# Altium PCB M3 ICE.PcbDoc (part 1 of 2)
Units mil, origin at the board's own origin, x right, y up, seen from the top; angles counter-clockwise.
Board outline 4160 x 4350 mil, 4 copper layers (Top Layer, Mid-Layer 1, Mid-Layer 2, Bottom Layer); 242 components, 240 nets, 954 pads, 145 vias.
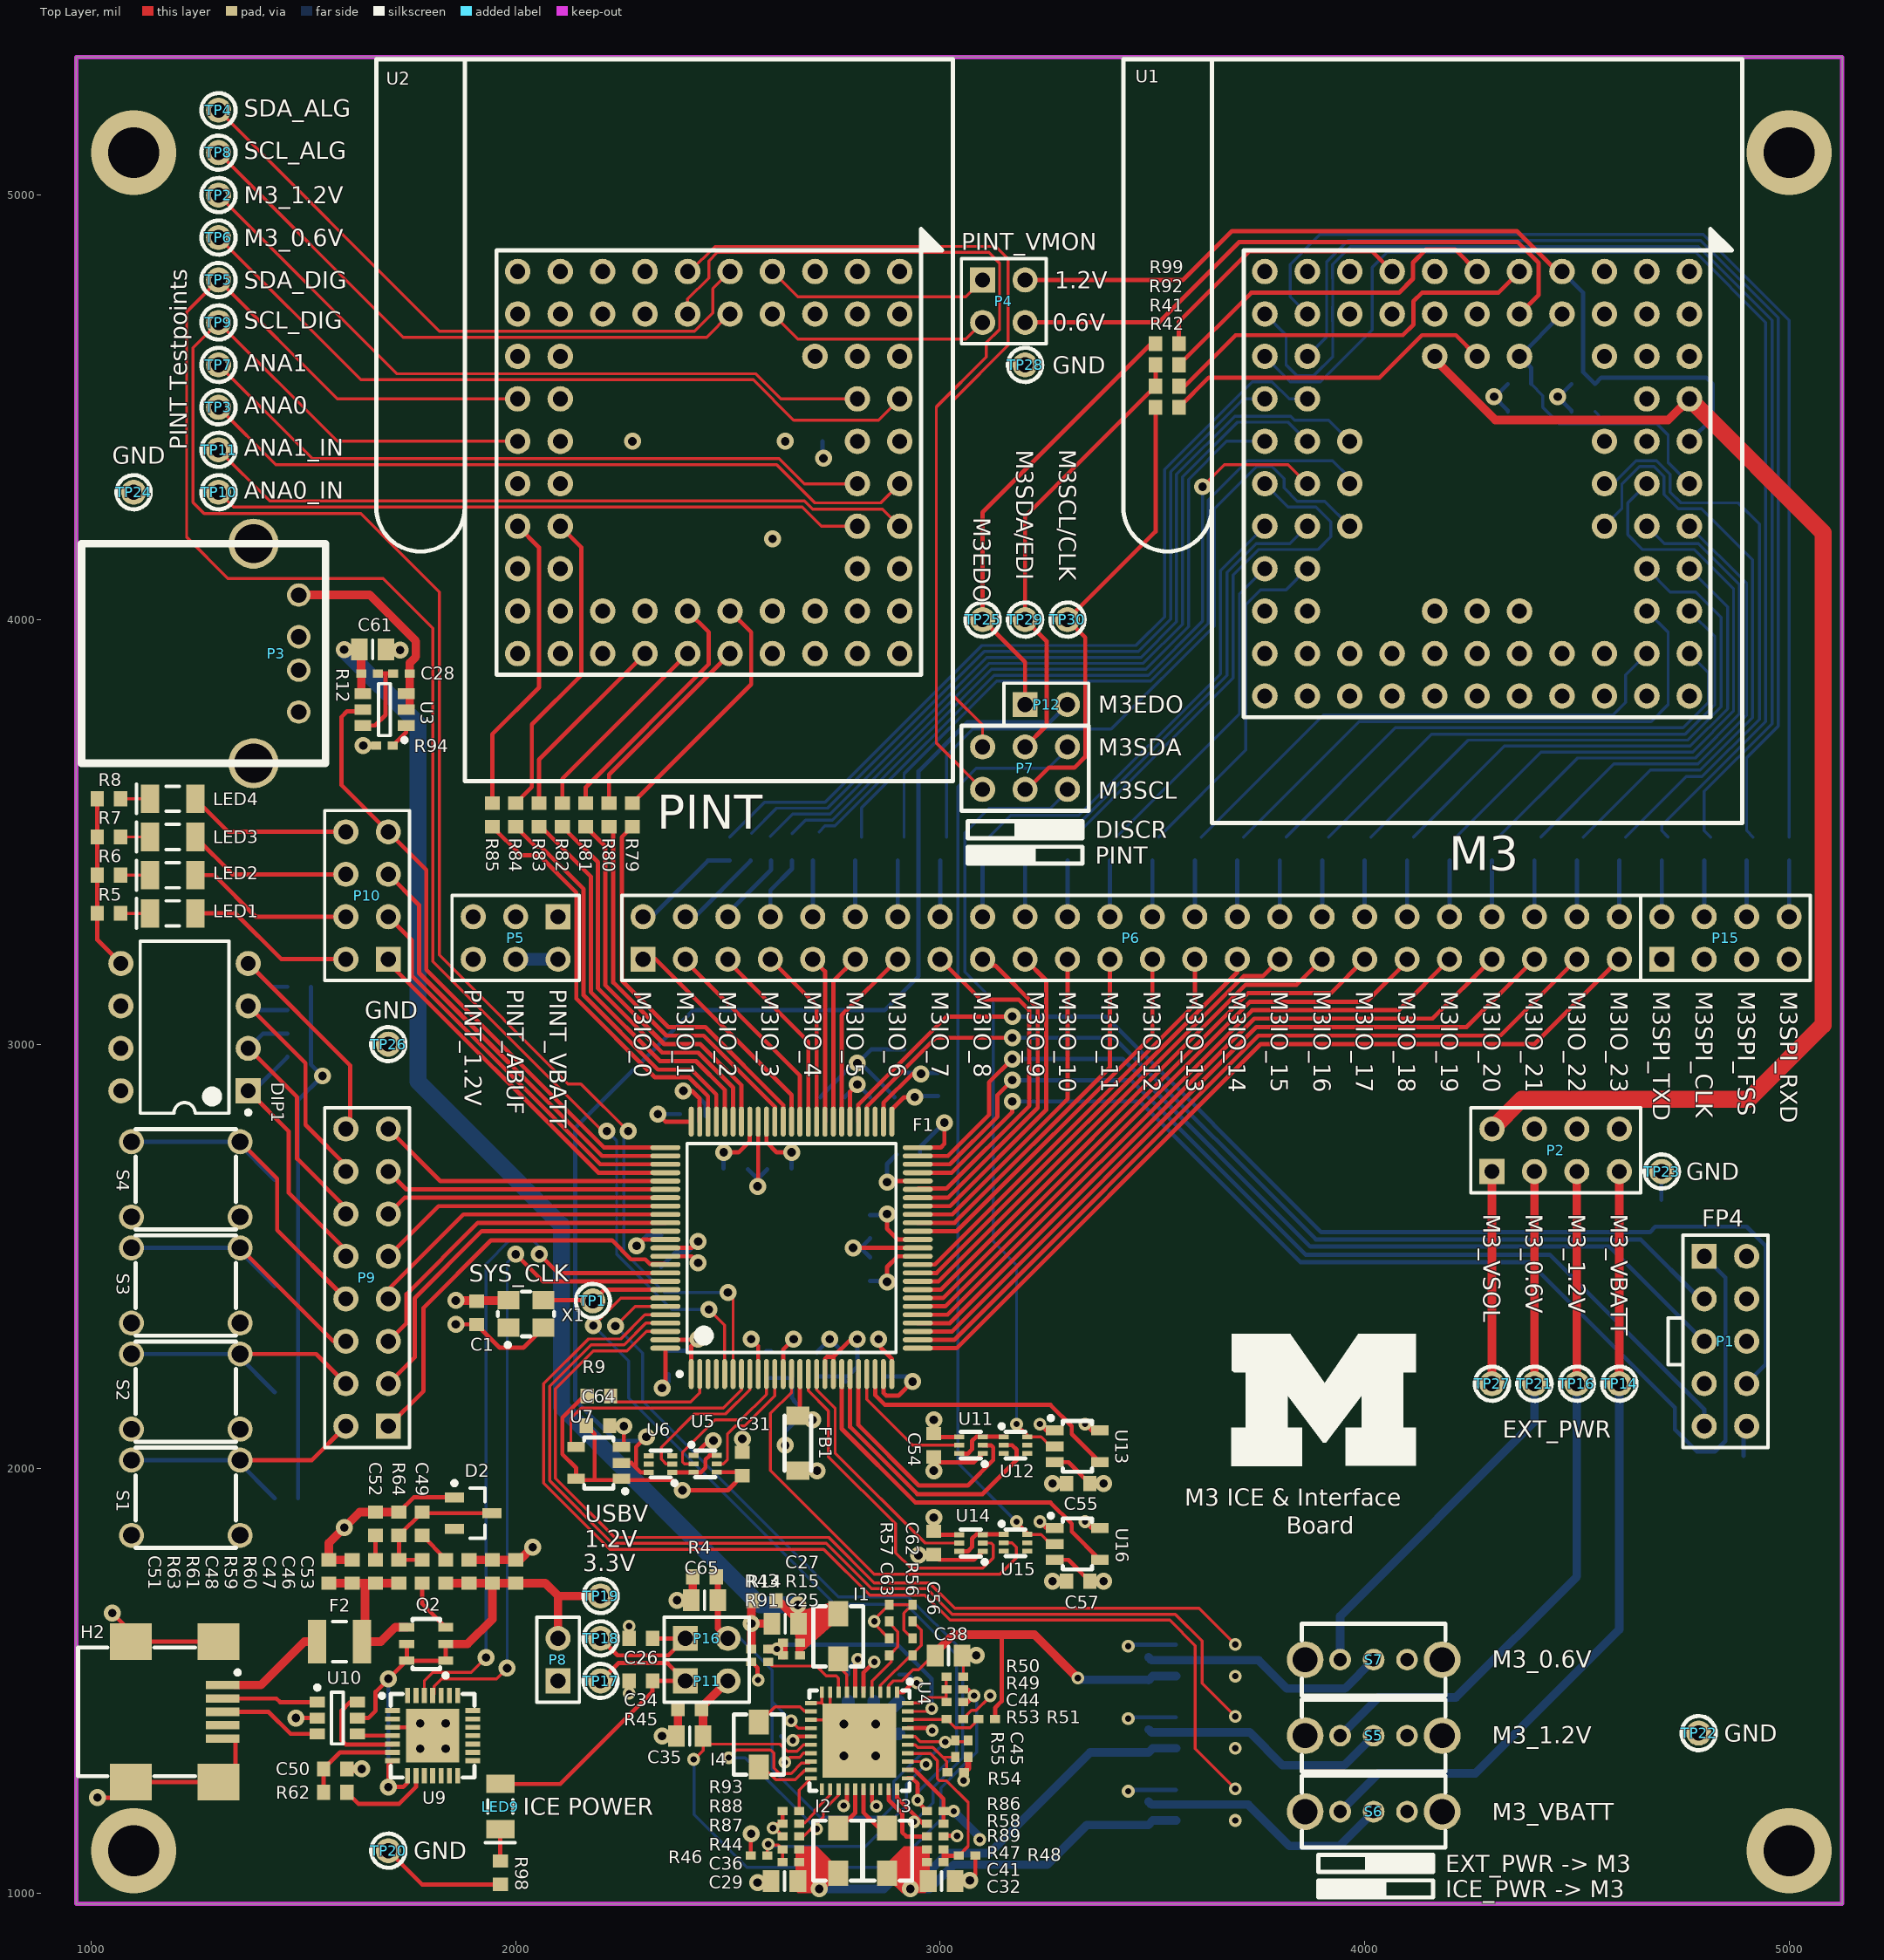
[diagram p0: Top Layer view]
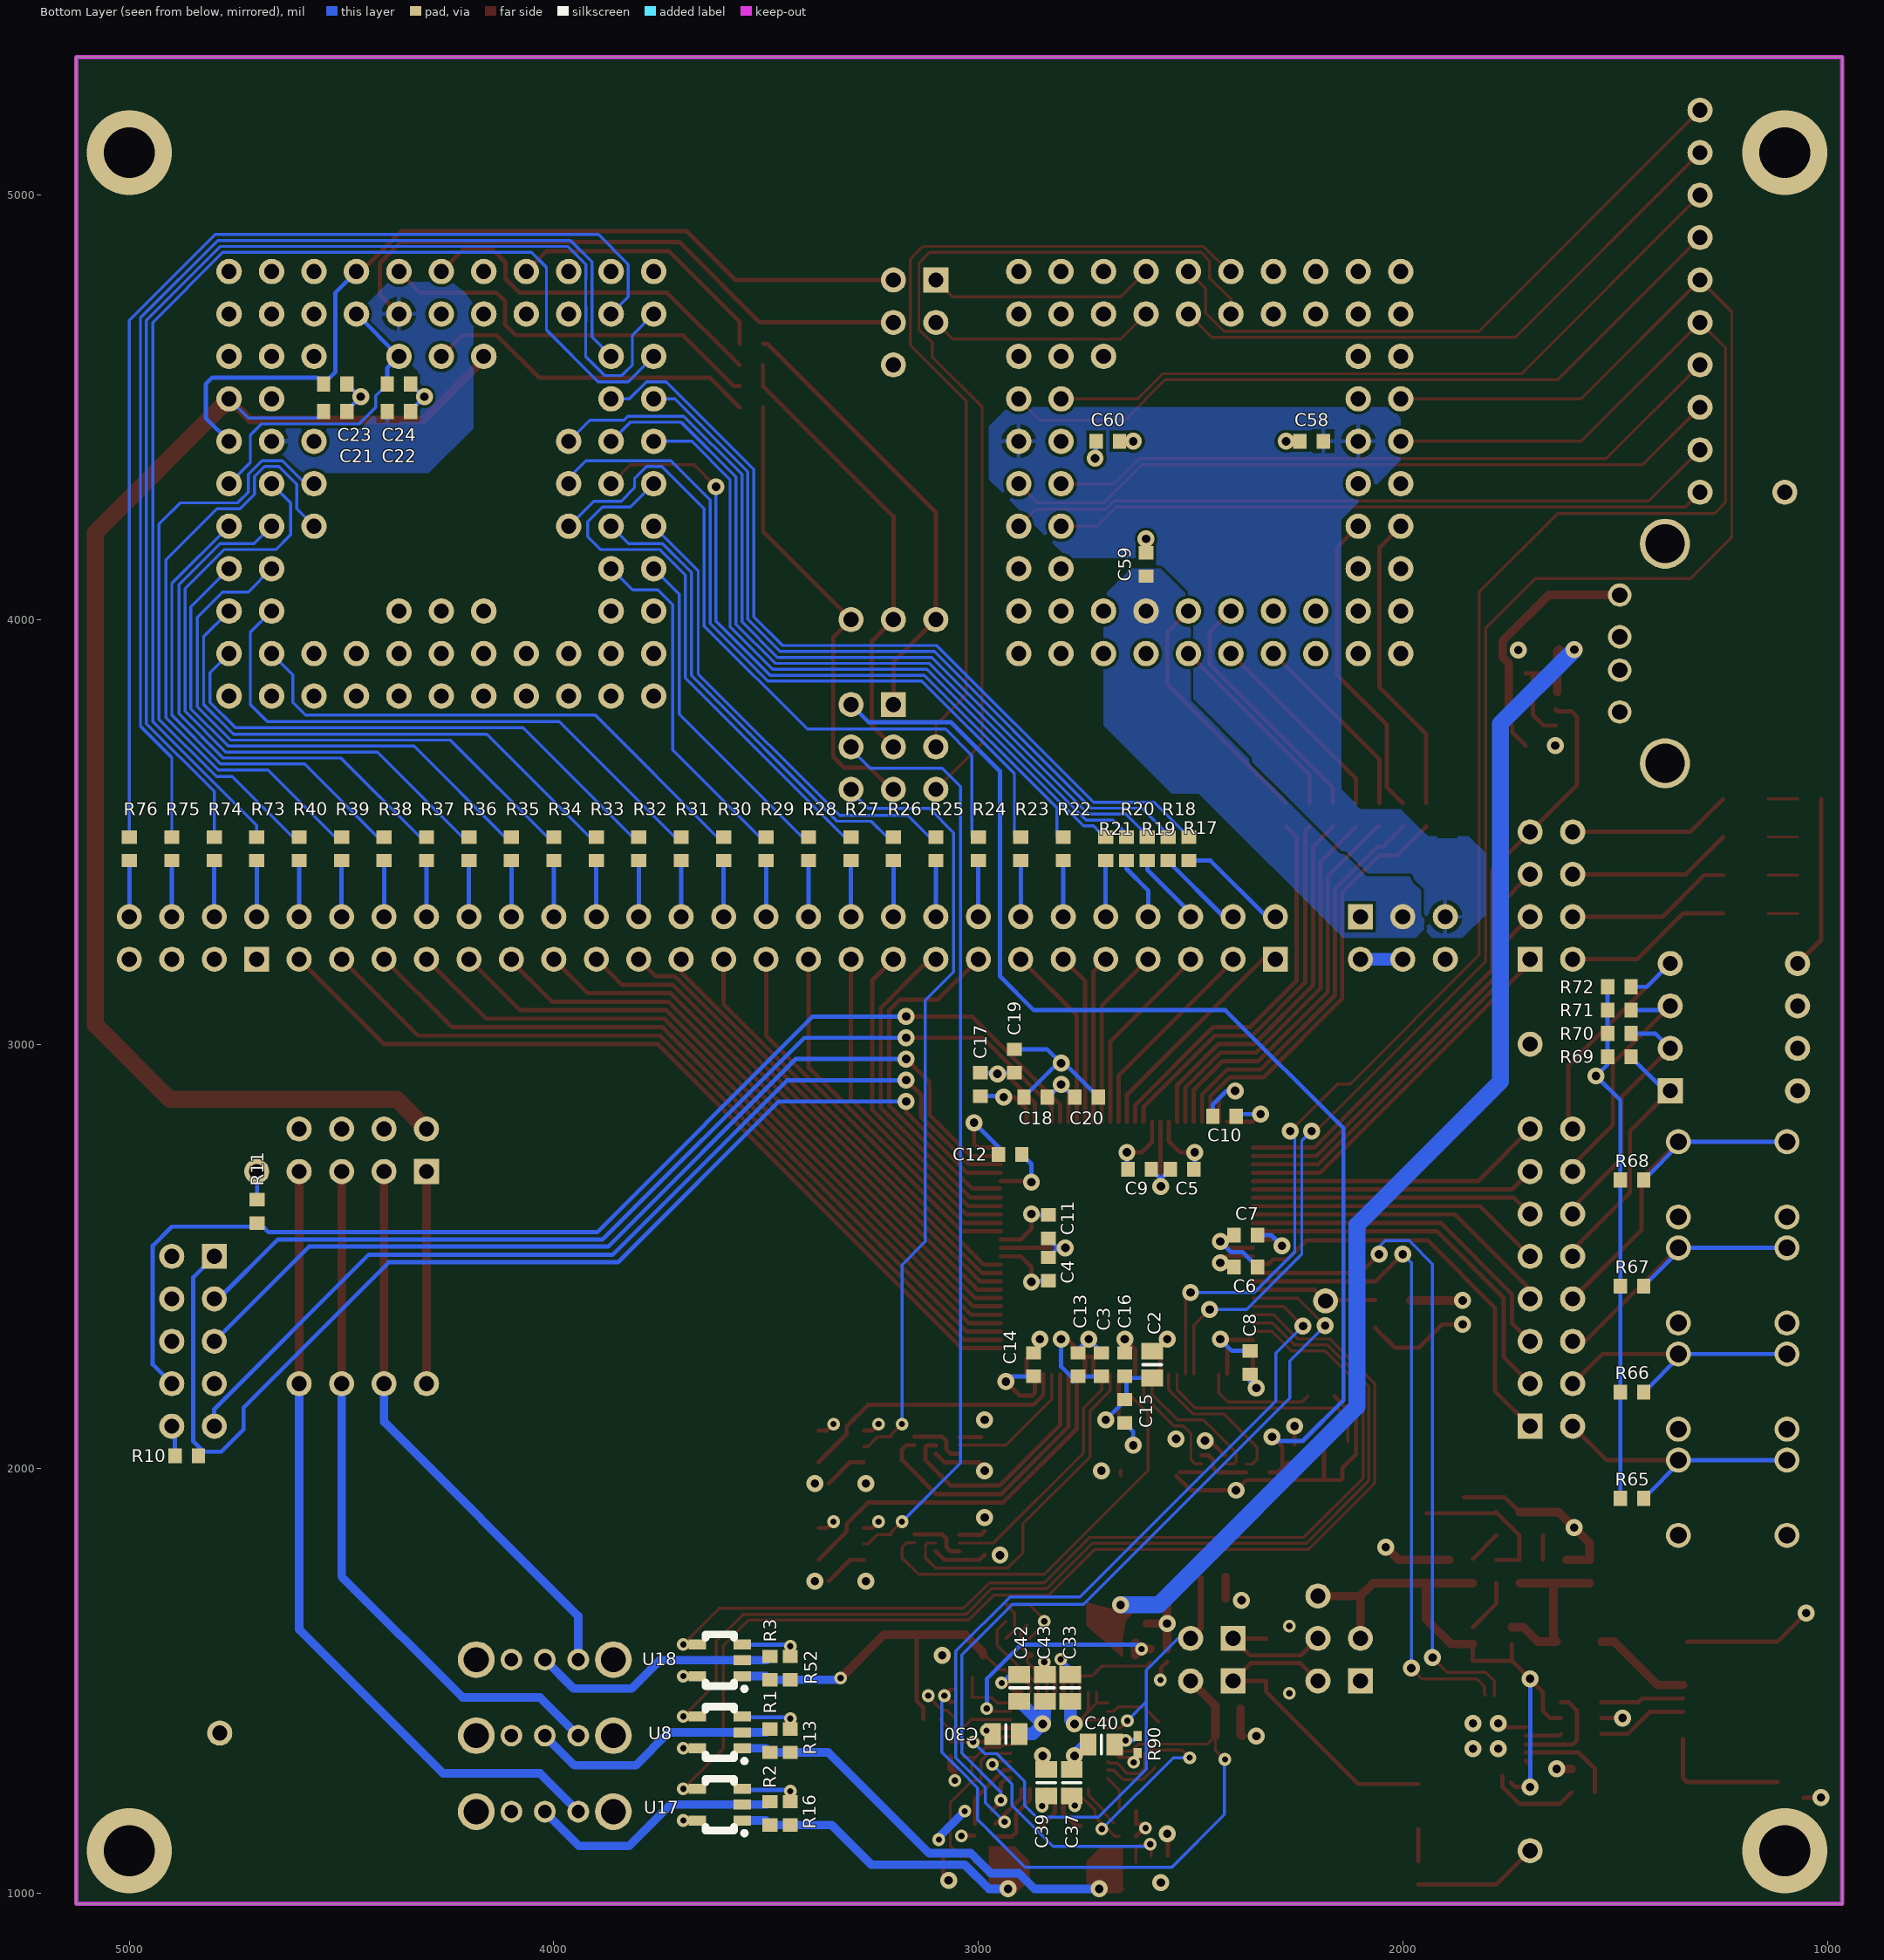
[diagram p1: Bottom Layer view, seen from below]
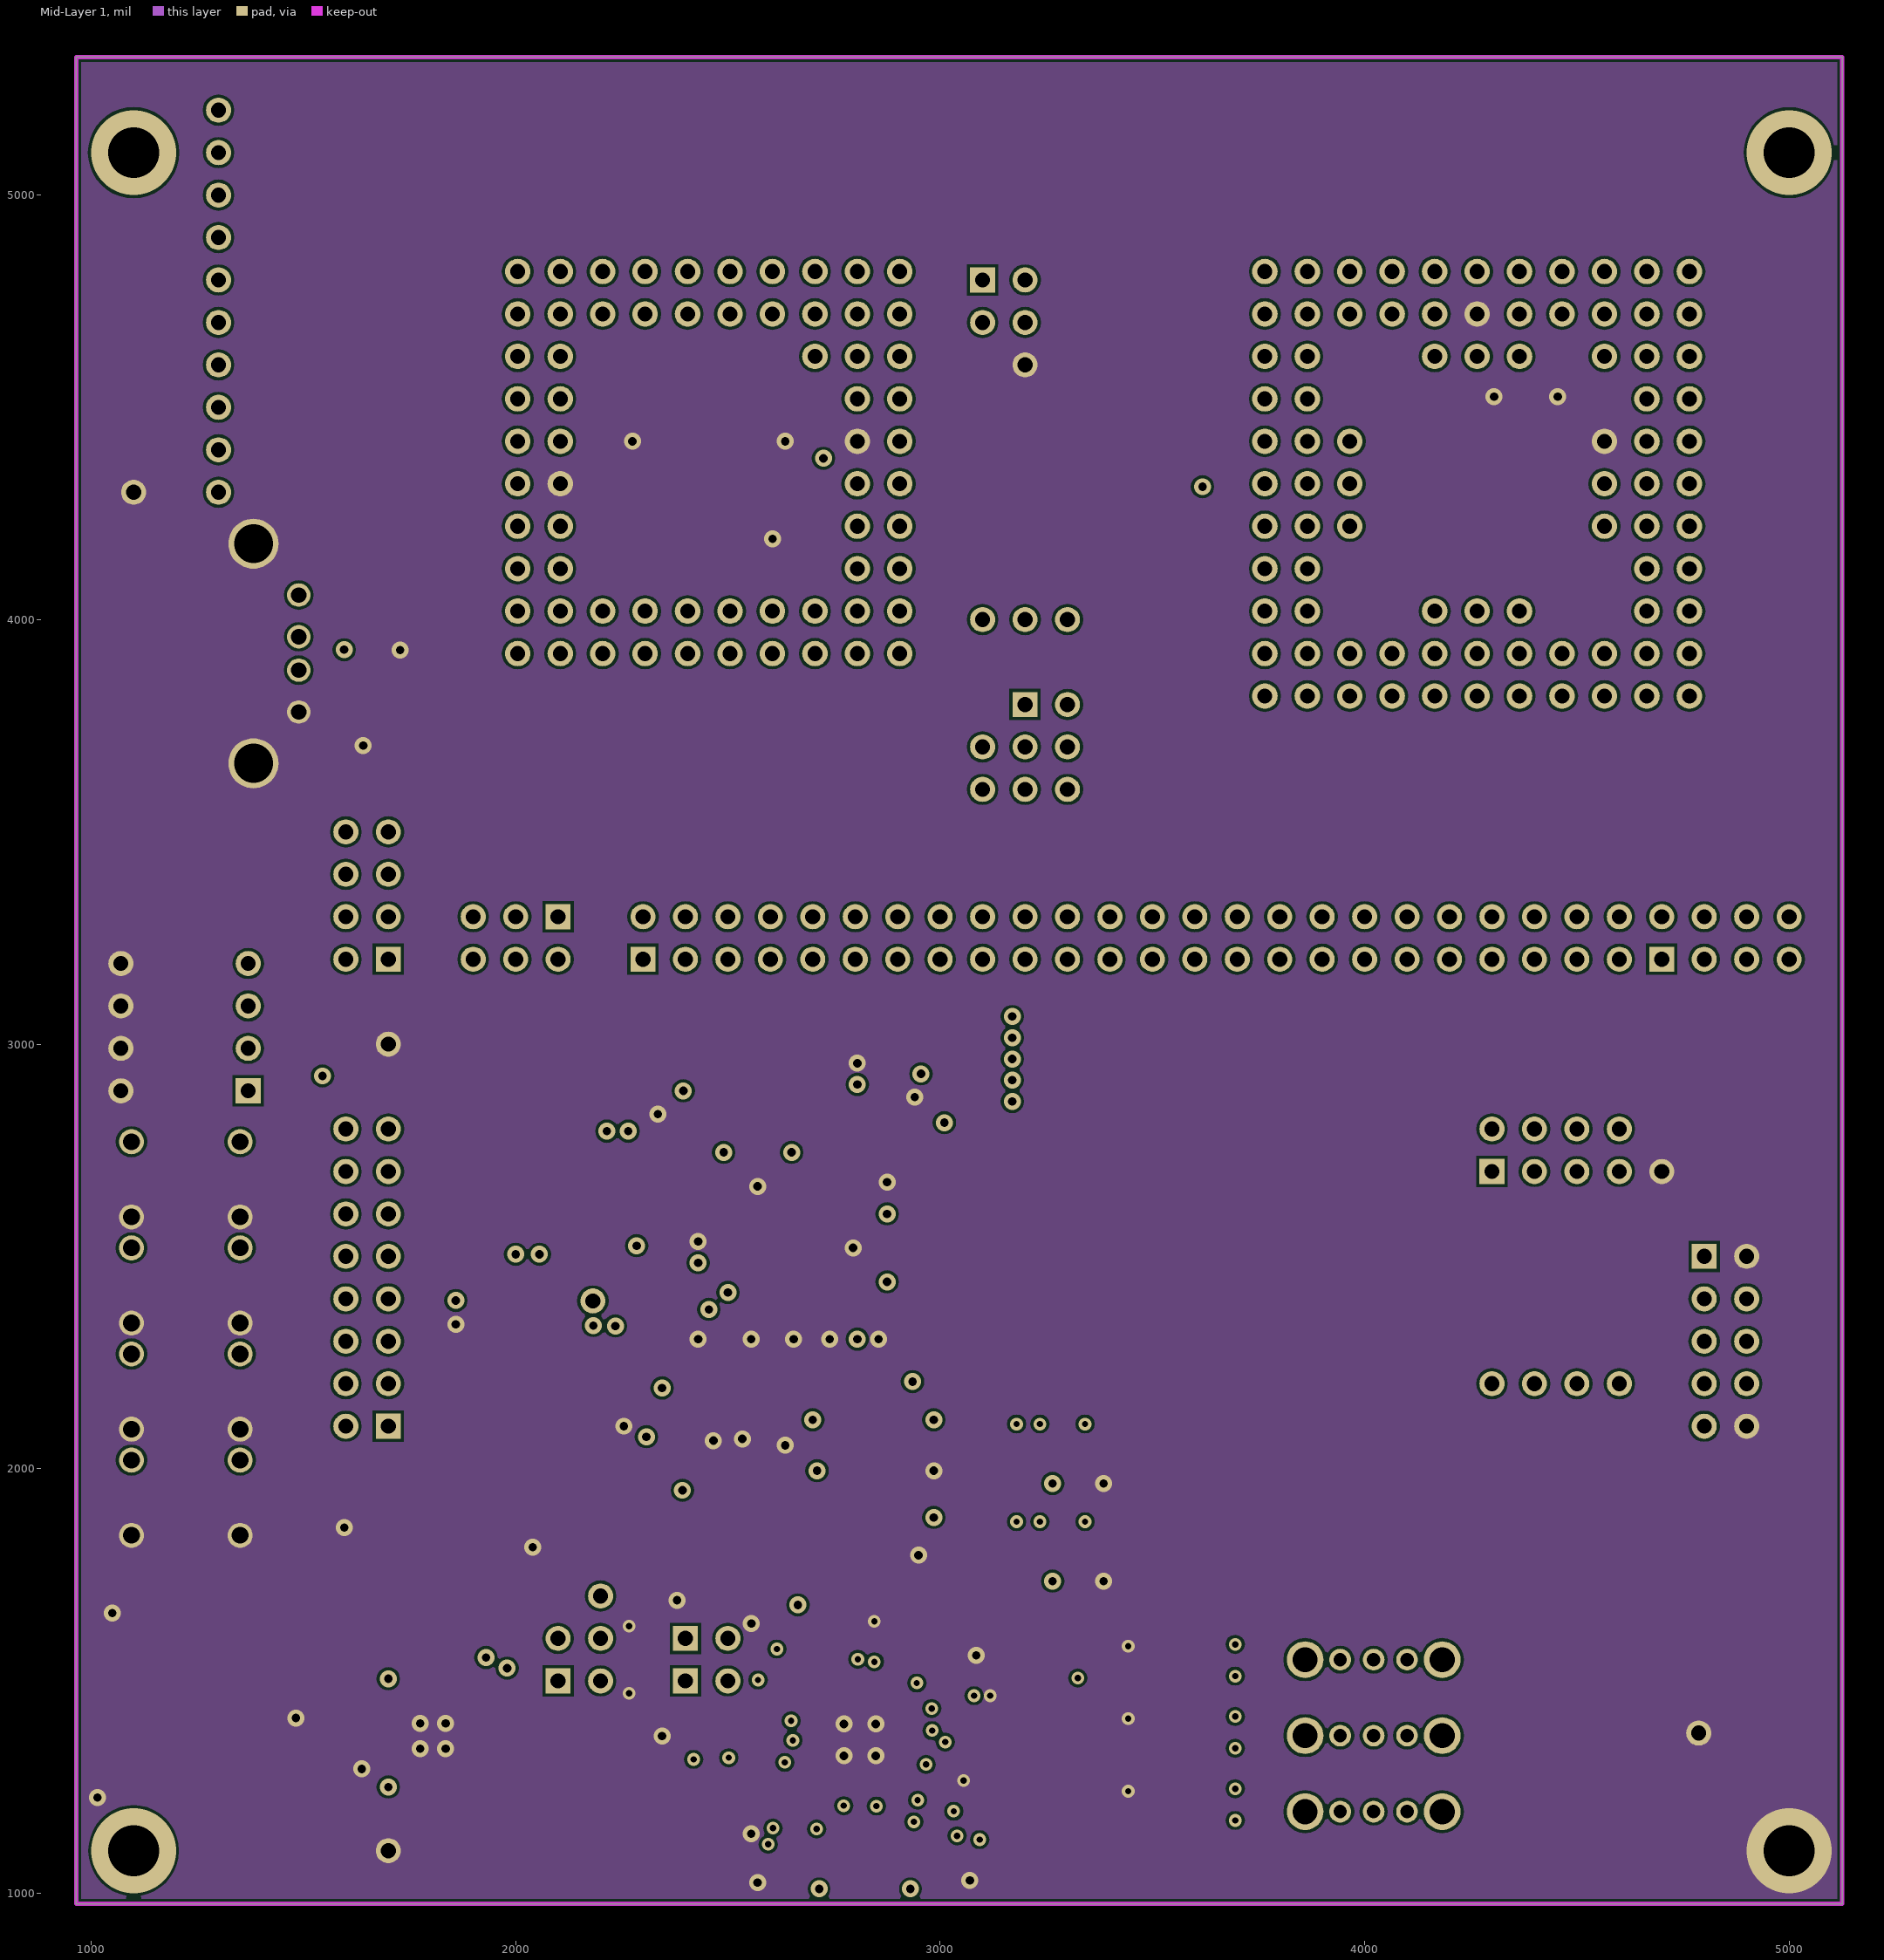
[diagram p2: Mid-Layer 1]
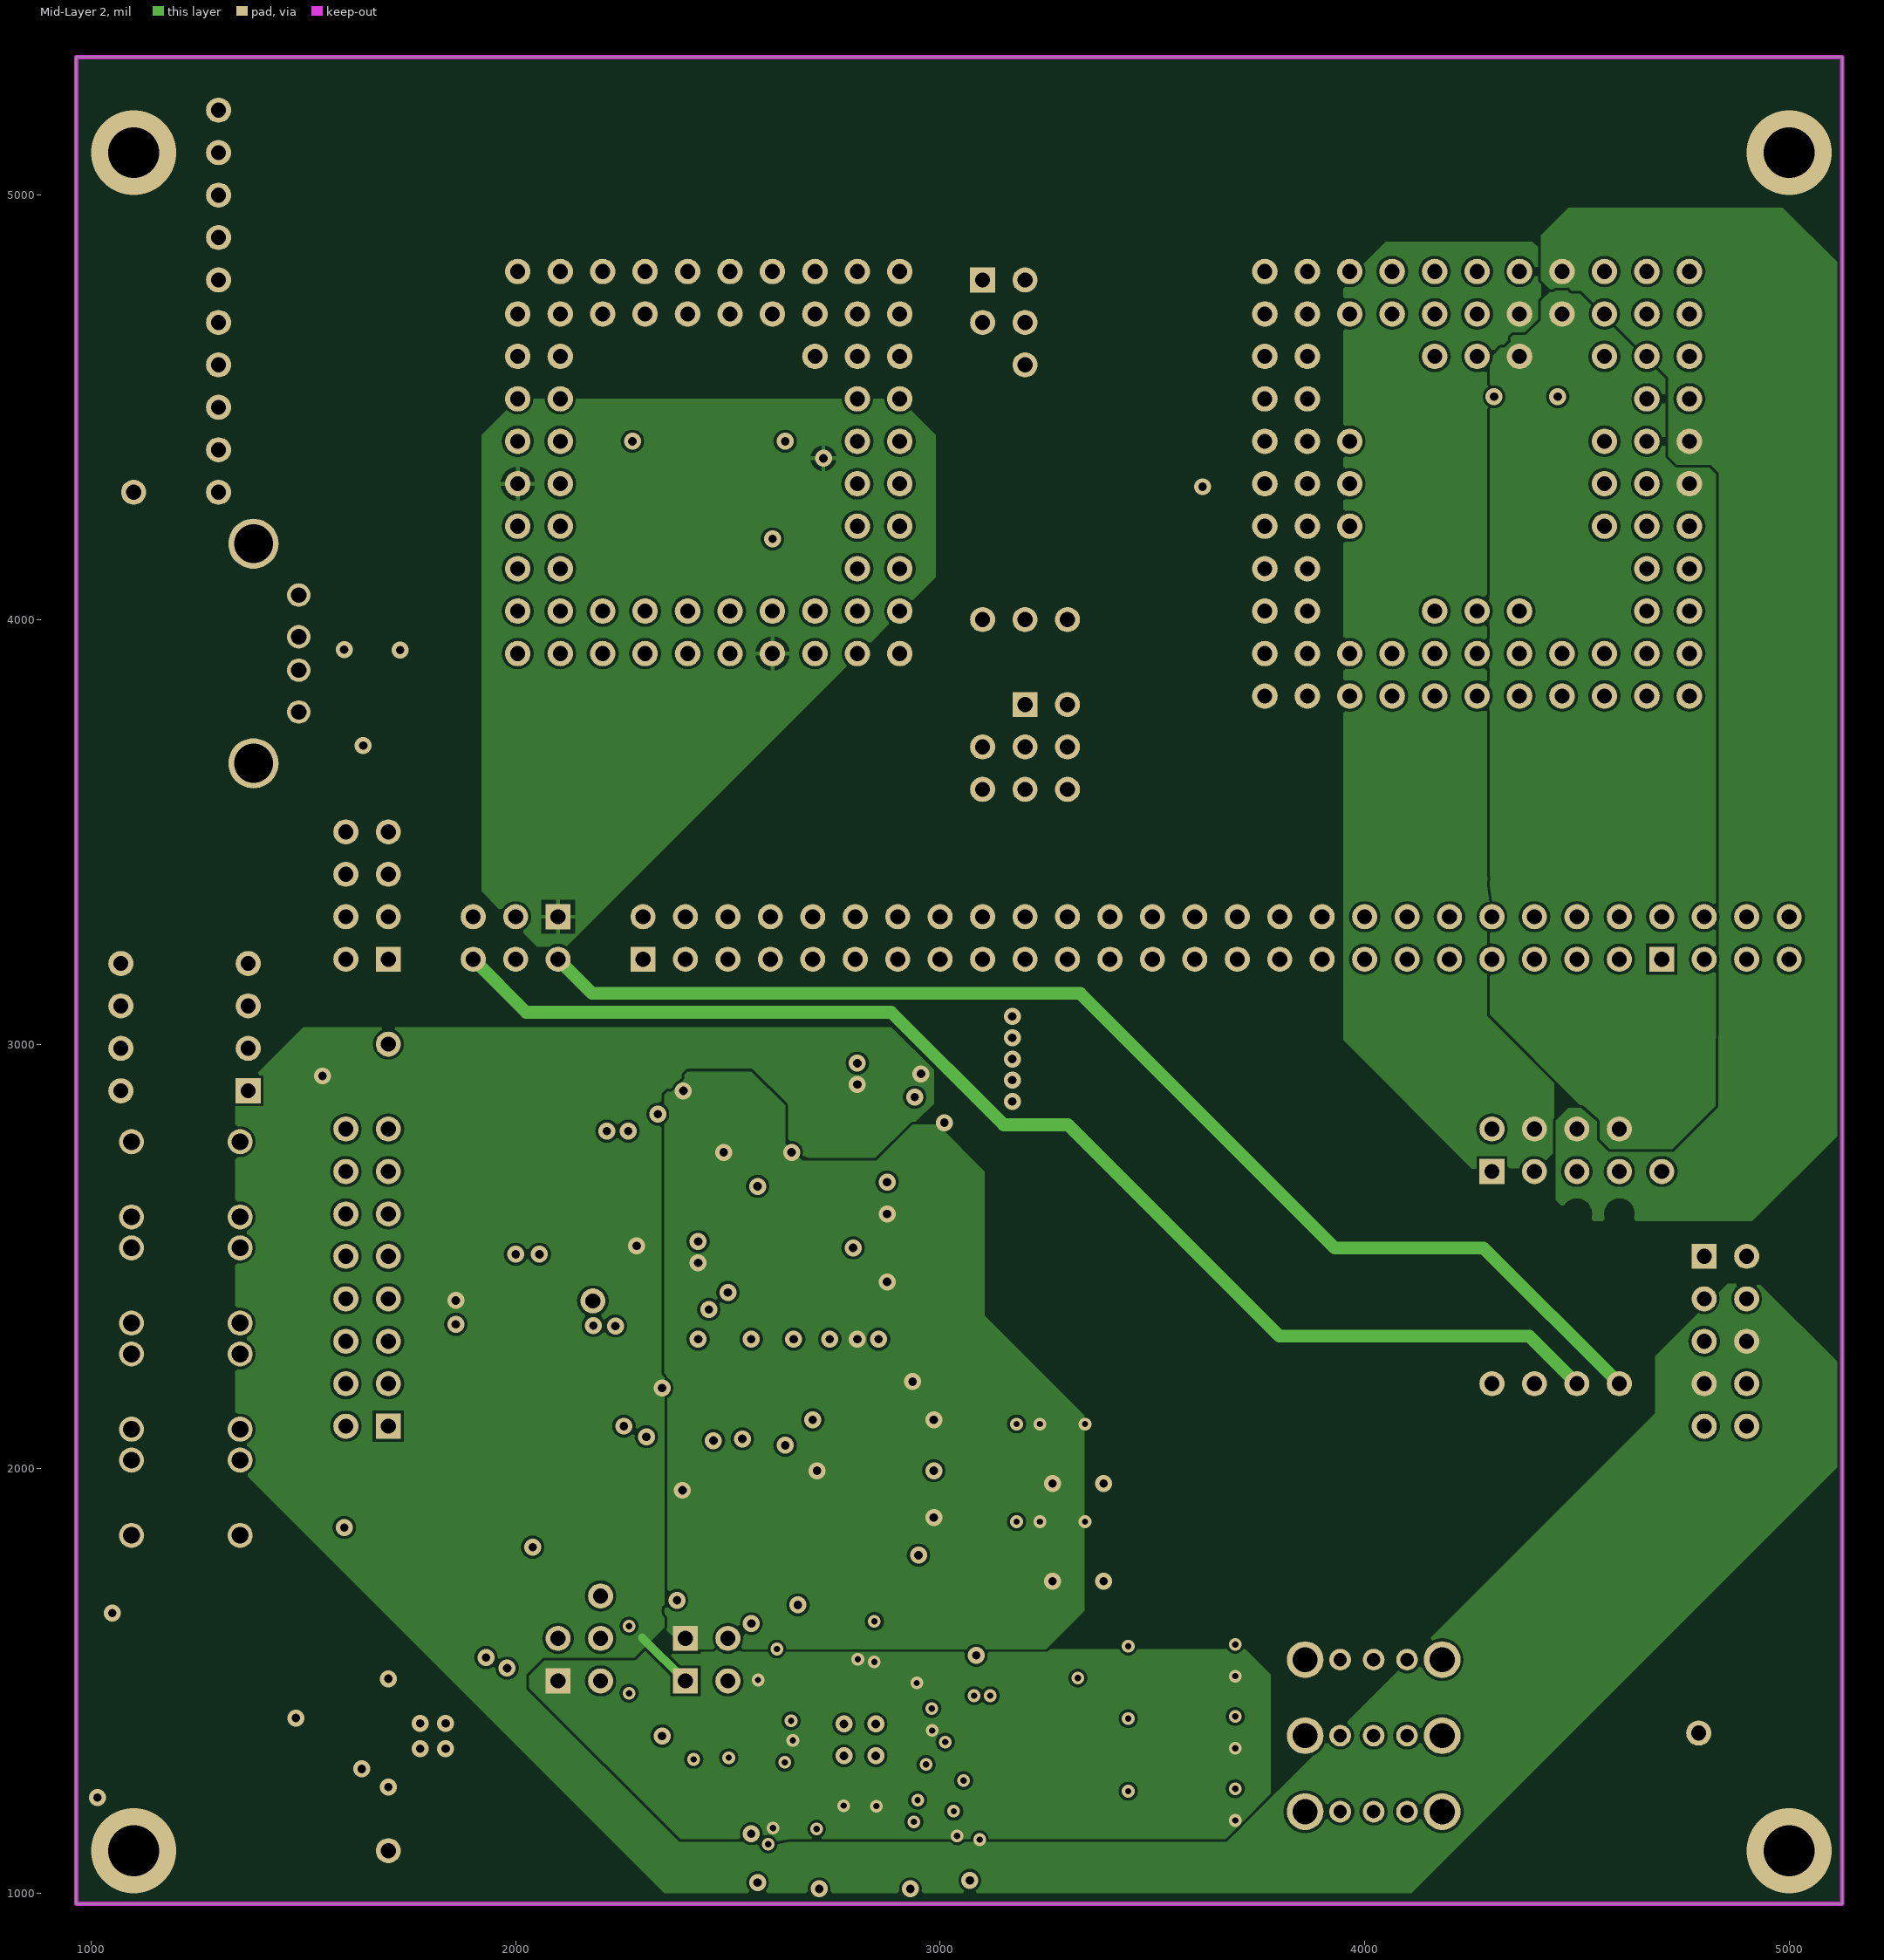
[diagram p3: Mid-Layer 2]

## Layer stack, top to bottom
Top Layer: signal copper 1.4
Dielectric: core 12.6, FR-4, Dk 4.8
Mid-Layer 1: signal copper 1.4
Dielectric: prepreg 12.6, FR-4, Dk 4.8
Mid-Layer 2: signal copper 1.4
Dielectric: core 12.6, FR-4, Dk 4.8
Bottom Layer: signal copper 1.4

## Board outline
965,975 965,5325 5125,5325 5125,975

## Design rules (kind name [scope] priority, off if disabled: settings)
Clearance [All] p1: gap=7
ComponentClearance [All] p1 off: gap=10 collisioncheckmode=3 verticalgap=10 showdistances=FALSE
HoleSize [All] p1: absolutevalues=TRUE maxlimit=1000 minlimit=1 maxpercent=80.000 minpercent=20.000
MinimumAnnularRing [All] p1: minimumring=7
MinimumSolderMaskSliver [All] p1: minsoldermaskwidth=0
PolygonConnect [All] p1: connectstyle=Direct reliefconductorwidth=10 reliefentries=4 polygonreliefangle="90 Angle" airgapwidth=10
RoutingVias [All] p1: holewidth=20 width=40 viastyle="Through Hole" minholewidth=15 minwidth=30 maxholewidth=28 maxwidth=50
SilkToSilkClearance [All] p1: silktosilkclearance=0
SilkscreenOverComponentPads [All] p1 off: minsilkscreentomaskgap=10
SolderMaskExpansion [All] p1: expansion=4
Width [All] p1: maxlimit=50 minlimit=7 preferedwidth=8
23 further rules are at their usual default settings.

## Classes and differential pairs
component class USB_to_UART: C46 C47 C48 C49 C50 C51 C52 C53 D2 F2 H2 Q2 R59 R60 R61 R62 R63 R64 U9 U10
component class Power: C25 C26 C27 C29 C30 C32 C33 C34 C35 C36 C37 C38 C39 C40 C41 C42 C43 C44 C45 C62 C63 C65 I1 I2 I3 I4 LED9 P8 P11 P16 R1 R2 R3 R4 R13 R14 R15 R16 R43 R44 R45 R46 R47 R48 R49 R50 R51 R52 R53 R54 R55 R56 R57 R58 R86 R87 R88 R89 R90 R91 R93 R98 S5 S6 S7 TP14 TP16 TP17 TP18 TP19 TP20 TP21 TP22 TP23 TP24 TP26 TP27 TP28 U4 U8 U17 U18
component class M3_Discrete_Interface: C31 C54 C55 C56 C57 C64 U5 U6 U7 U11 U12 U13 U14 U15 U16
component class M3_Chip: C21 C22 C23 C24 C58 C59 C60 P2 P4 P5 P6 P7 P12 P15 R17 R18 R19 R20 R21 R22 R23 R24 R25 R26 R27 R28 R29 R30 R31 R32 R33 R34 R35 R36 R37 R38 R39 R40 R41 R42 R73 R74 R75 R76 R79 R80 R81 R82 R83 R84 R85 R92 R99 TP2 TP3 TP4 TP5 TP6 TP7 TP8 TP9 TP10 TP11 TP25 TP29 TP30 U1 U2
component class FPGA_misc: C1 C2 C3 C4 C5 C6 C7 C8 C9 C10 C11 C12 C13 C14 C15 C16 C17 C18 C19 C20 FB1 P1 R10 R11 TP1 X1
component class FPGA_IO: C28 C61 DIP1 F1 LED0 LED1 LED2 LED3 LED4 P3 P9 P10 R5 R6 R7 R8 R9 R12 R65 R66 R67 R68 R69 R70 R71 R72 R94 S1 S2 S3 S4 U3

## Components (designator, comment, footprint, x,y, rotation, side; value= is the part's Value field where it differs from the comment)
C1 "Cap Semi" 1608[0603] 1908,2367 r90 top
C2 "Cap Chip" 0805 2590,2245 r270 bottom
C3 "Cap Semi" 1608[0603] 2710,2245 r270 bottom
C4 "Cap Semi" 1608[0603] 2835,2470 r270 bottom
C5 "Cap Semi" 1608[0603] 2520,2705 r180 bottom
C6 "Cap Semi" 1608[0603] 2370,2475 r0 bottom
C7 "Cap Semi" 1608[0603] 2370,2550 r180 bottom
C8 "Cap Semi" 1608[0603] 2360,2250 r270 bottom
C9 "Cap Semi" 1608[0603] 2620,2705 r0 bottom
C10 "Cap Semi" 1608[0603] 2420,2830 r0 bottom
C11 "Cap Semi" 1608[0603] 2835,2570 r90 bottom
C12 "Cap Semi" 1608[0603] 2925,2740 r0 bottom
C13 "Cap Semi" 1608[0603] 2765,2245 r270 bottom
C14 "Cap Semi" 1608[0603] 2870,2245 r270 bottom
C15 "Cap Semi" 1608[0603] 2655,2135 r90 bottom
C16 "Cap Semi" 1608[0603] 2655,2245 r270 bottom
C17 "Cap Semi" 1608[0603] 2995,2905 r90 bottom
C18 "Cap Semi" 1608[0603] 2865,2875 r180 bottom
C19 "Cap Semi" 1608[0603] 2915,2960 r270 bottom
C20 "Cap Semi" 1608[0603] 2745,2875 r0 bottom
C21 "Cap Semi" 1608[0603] 4515,4490 r0 bottom
C22 "Cap Semi" 1608[0603] 4365,4490 r0 bottom
C23 "Cap Semi" 1608[0603] 4515,4555 r0 bottom
C24 "Cap Semi" 1608[0603] 4365,4555 r0 bottom
C25 "Cap Semi" 0402 2650,1560 r0 top
C26 "Cap Semi" 1608[0603] 2295,1600 r0 top
C27 "Cap Chip" 0805 2635,1635 r0 top
C28 "Cap Semi" 0402 1731,3873 r180 top
C29 "Cap Chip" 0805 2633.43,1028.35 r0 top
C30 "Cap Chip" 0805 2935,1375 r180 bottom
C31 "Cap Semi" 1608[0603] 2534,2010.69 r270 top
C32 "Cap Chip" 0805 3003.43,1028.35 r180 top
C33 "Cap Chip" 0805 2783.43,1483.35 r270 bottom
C34 "Cap Semi" 1608[0603] 2295,1500 r0 top
C35 "Cap Chip" 0805 2410,1370 r0 top
C36 "Cap Semi" 0402 2648.43,1073.35 r0 top
C37 "Cap Chip" 0805 2780,1260 r90 bottom
C38 "Cap Chip" 0805 3020,1560 r180 top
C39 "Cap Chip" 0805 2840,1260 r90 bottom
C40 "Cap Chip" 0805 2710,1350 r0 bottom
C41 "Cap Semi" 0402 2988.43,1073.35 r180 top
C42 "Cap Chip" 0805 2903.43,1483.35 r270 bottom
C43 "Cap Chip" 0805 2843.43,1483.35 r270 bottom
C44 "Cap Semi" 0402 3035,1450 r0 top
C45 "Cap Semi" 0402 3066,1340 r270 top
C46 "Cap Semi" 1608[0603] 1945,1757.56 r270 top
C47 "Cap Semi" 1608[0603] 1890,1757.56 r270 top
C48 "Cap Semi" 1608[0603] 1725,1757.56 r270 top
C49 "Cap Semi" 1608[0603] 1780,1870 r90 top
C50 "Cap Semi" 1608[0603] 1575,1292.56 r180 top
C51 "Cap Semi" 1608[0603] 1560,1757.56 r270 top
C52 "Cap Semi" 1608[0603] 1670,1870 r270 top
C53 "Cap Semi" 1608[0603] 2000,1757.56 r270 top
C54 "Cap Semi" 1608[0603] 2985,2055 r90 top
C55 "Cap Semi" 1608[0603] 3325,1965 r180 top
C56 "Cap Semi" 1608[0603] 2985,1825 r90 top
C57 "Cap Semi" 1608[0603] 3325,1735 r180 top
C58 "Cap Semi" 1608[0603] 2215,4420 r180 bottom
C59 "Cap Semi" 1608[0603] 2605,4130 r270 bottom
C60 "Cap Semi" 1608[0603] 2695,4420 r0 bottom
C61 "Cap Chip" 0805 1663,3930 r0 top
C62 "Cap Semi" 0402 2935,1660 r270 top
C63 "Cap Semi" 0402 2880,1580 r270 top
C64 "Cap Semi" 1608[0603] 2194,2101 r180 top
C65 "Cap Chip" 0805 2445,1690 r180 top
D2 "BAT54" SOT-23_N 1900,1895 r0 top
DIP1 "ADE0404" DIP-8 1220,3040 r180 top
F1 "AGLN250V2-VQG100" VQ100_N 2650,2520 r90 top
F2 "MICROSMD050F-2" 1210 1585,1592.56 r0 top
FB1 "HF30ACC321611-T" Ferrite_Bead_3.2mm_1.6mm 2665,1995 r90 top
H2 "UX60A-MB-5ST" "USB Mini-B" 1310,1490 r270 top
I1 "NR5040T1R5N" INDUCTOR_.118x.142mm 2760,1605 r90 top
I2 "NR5040T1R5N" INDUCTOR_.118x.142mm 2760,1100 r270 top
I3 "NR5040T1R5N" INDUCTOR_.118x.142mm 2875,1100 r270 top
I4 "NR5040T1R5N" INDUCTOR_.118x.142mm 2573,1350 r270 top
LED1 "LED 1206" 1206_LED 1192,3308 r180 top
LED2 "LED 1206" 1206_LED 1192,3398 r180 top
LED3 "LED 1206" 1206_LED 1192,3488 r180 top
LED4 "LED 1206" 1206_LED 1192,3578 r180 top
LED9 "LED 1206" 1206_LED 1964,1204 r270 top
P1 "Header 5X2" HDR2X5 4800,2500 r270 top
P2 "Header 4X2" HDR2X4 4300,2700 r0 top
P3 "USB_HORIZONTAL" USB_HORIZONTAL 1489,4058 r270 top
P4 "Header 2X2" HDR2X2 3100,4800 r270 top
P5 "Header 3X2" HDR2X3 2100,3300 r180 top
P6 "Header 24X2" HDR2X24 2300,3200 r0 top
P7 "2P2T .1\" Mux" HDR3x2 3100,3700 r0 top
P8 "Header 2" HDR1X2 2100,1500 r90 top
P9 "Header 8X2" HDR2X8 1700,2100 r90 top
P10 "Header 4X2" HDR2X4 1700,3200 r90 top
P11 "Header 2" HDR1X2 2400,1500 r0 top
P12 "Header 2" HDR1X2 3200,3800 r0 top
P15 "Header 4X2" HDR2X4 4700,3200 r0 top
P16 "Header 2" HDR1X2 2400,1600 r0 top
Q2 "SI3477" TSOP-6 1835,1547.56 r90 top
R1 "Res Chip" 0603 3491,1359 r270 bottom
R2 "Res Chip" 0603 3491,1188 r270 bottom
R3 "Res Chip" 0603 3491,1530 r270 bottom
R4 "Res Chip" 0603 2445,1745 r180 top
R5 "Res Chip" 0603 1042,3308 r0 top
R6 "Res Chip" 0603 1042,3398 r0 top
R7 "Res Chip" 0603 1042,3488 r0 top
R8 "Res Chip" 0603 1042,3578 r0 top
R9 "Res Chip" 0603 2196,2171 r180 top
R10 "Res Chip" 0603 4865,2030 r0 bottom
R11 "Res Chip" 0603 4699,2606 r90 bottom
R12 "Res Chip" 0402 1656,3873 r0 top
R13 "Res Chip" 0603 3443,1359 r270 bottom
R14 "Res Chip" 0603 2586,1689 r0 top
R15 "Res Chip" 0402 2650,1590 r180 top
R16 "Res Chip" 0603 3443,1188 r270 bottom
R17 "Res Chip" 0603 2504,3460 r270 bottom
R18 "Res Chip" 0603 2553,3460 r270 bottom
R19 "Res Chip" 0603 2602,3460 r270 bottom
R20 "Res Chip" 0603 2651,3460 r270 bottom
R21 "Res Chip" 0603 2700,3460 r270 bottom
R22 "Res Chip" 0603 2800,3460 r270 bottom
R23 "Res Chip" 0603 2900,3460 r270 bottom
R24 "Res Chip" 0603 3000,3460 r270 bottom
R25 "Res Chip" 0603 3100,3460 r270 bottom
R26 "Res Chip" 0603 3200,3460 r270 bottom
R27 "Res Chip" 0603 3300,3460 r270 bottom
R28 "Res Chip" 0603 3400,3460 r270 bottom
R29 "Res Chip" 0603 3500,3460 r270 bottom
R30 "Res Chip" 0603 3600,3460 r270 bottom
R31 "Res Chip" 0603 3700,3460 r270 bottom
R32 "Res Chip" 0603 3800,3460 r270 bottom
R33 "Res Chip" 0603 3900,3460 r270 bottom
R34 "Res Chip" 0603 4000,3460 r270 bottom
R35 "Res Chip" 0603 4100,3460 r270 bottom
R36 "Res Chip" 0603 4200,3460 r270 bottom
R37 "Res Chip" 0603 4300,3460 r270 bottom
R38 "Res Chip" 0603 4400,3460 r270 bottom
R39 "Res Chip" 0603 4500,3460 r270 bottom
R40 "Res Chip" 0603 4600,3460 r270 bottom
R41 "Res Chip" 0603 3535,4550 r180 top
R42 "Res Chip" 0603 3535,4500 r180 top
R43 "Res Chip" 0402 2575,1575 r180 top
R44 "Res Chip" 0402 2648.43,1103.35 r180 top
R45 "Res Chip" 0603 2410,1435 r0 top
R46 "Res Chip" 0402 2573.43,1088.35 r180 top
R47 "Res Chip" 0402 2988.43,1103.35 r0 top
R48 "Res Chip" 0402 3063.43,1088.35 r0 top
R49 "Res Chip" 0402 3035,1480 r180 top
R50 "Res Chip" 0402 3035,1510 r0 top
R51 "Res Chip" 0402 3110,1410 r180 top
R52 "Res Chip" 0603 3443,1530 r270 bottom
R53 "Res Chip" 0402 3035,1410 r0 top
R54 "Res Chip" 0402 3037,1285 r180 top
R55 "Res Chip" 0402 3036,1340 r90 top
R56 "Res Chip" 0402 2935,1580 r90 top
R57 "Res Chip" 0402 2880,1660 r90 top
R58 "Res Chip" 0402 2988.43,1163.35 r0 top
R59 "Res Chip" 0603 1780,1757.56 r270 top
R60 "Res Chip" 0603 1835,1757.56 r270 top
R61 "Res Chip" 0603 1670,1757.56 r270 top
R62 "Res Chip" 0603 1575,1237.56 r180 top
R63 "Res Chip" 0603 1615,1757.56 r270 top
R64 "Res Chip" 0603 1725,1870 r270 top
R65 "Res Chip" 0603 1460,1930 r180 bottom
R66 "Res Chip" 0603 1460,2180 r180 bottom
R67 "Res Chip" 0603 1460,2430 r180 bottom
R68 "Res Chip" 0603 1460,2680 r180 bottom
R69 "Res Chip" 0603 1490,2970 r180 bottom
R70 "Res Chip" 0603 1490,3025 r180 bottom
R71 "Res Chip" 0603 1490,3080 r180 bottom
R72 "Res Chip" 0603 1490,3135 r180 bottom
R73 "Res Chip" 0603 4700,3460 r270 bottom
R74 "Res Chip" 0603 4800,3460 r270 bottom
R75 "Res Chip" 0603 4900,3460 r270 bottom
R76 "Res Chip" 0603 5000,3460 r270 bottom
R79 "Res Chip" 0603 2275,3540 r90 top
R80 "Res Chip" 0603 2220,3540 r90 top
R81 "Res Chip" 0603 2165,3540 r90 top
R82 "Res Chip" 0603 2110,3540 r90 top
R83 "Res Chip" 0603 2055,3540 r90 top
R84 "Res Chip" 0603 2000,3540 r90 top
R85 "Res Chip" 0603 1945,3540 r90 top
R86 "Res Chip" 0402 2988.43,1193.35 r0 top
R87 "Res Chip" 0402 2648.43,1133.35 r180 top
R88 "Res Chip" 0402 2648.43,1163.35 r180 top
R89 "Res Chip" 0402 2988.43,1133.35 r0 top
R90 "Res Chip" 0402 2625,1350 r90 bottom
R91 "Res Chip" 0402 2575,1545 r180 top
R92 "Res Chip" 0603 3535,4600 r180 top
R93 "Res Chip" 0402 2648.43,1193.35 r0 top
R94 "Res Chip" 0402 1691,3703 r180 top
R98 "Res Chip" 0603 1964,1048 r90 top
R99 "Res Chip" 0603 3535,4650 r180 top
S1 "EVQ-PAE04M" EVQPA 1095,2020 r270 top
S2 "EVQ-PAE04M" EVQPA 1095,2270 r270 top
S3 "EVQ-PAE04M" EVQPA 1095,2520 r270 top
S4 "EVQ-PAE04M" EVQPA 1095,2770 r270 top
S5 "OS102011MS2QN1" SPDT_SW2 4100,1371 r180 top
S6 "OS102011MS2QN1" SPDT_SW2 4100,1192 r180 top
S7 "OS102011MS2QN1" SPDT_SW2 4100,1550 r180 top
TP1 "TP" TP 2182,2395 r0 top
TP2 "TP" TP 1300,5000 r0 top
TP3 "TP" TP 1300,4500 r90 top
TP4 "TP" TP 1300,5200 r0 top
TP5 "TP" TP 1300,4800 r0 top
TP6 "TP" TP 1300,4900 r90 top
TP7 "TP" TP 1300,4600 r90 top
TP8 "TP" TP 1300,5100 r0 top
TP9 "TP" TP 1300,4700 r0 top
TP10 "TP" TP 1300,4300 r90 top
TP11 "TP" TP 1300,4400 r90 top
TP14 "TP" TP 4600,2200 r180 top
TP16 "TP" TP 4500,2200 r90 top
TP17 "TP" TP 2200,1500 r180 top
TP18 "TP" TP 2200,1600 r180 top
TP19 "TP" TP 2200,1700 r90 top
TP20 "TP" TP 1700,1100 r90 top
TP21 "TP" TP 4400,2200 r180 top
TP22 "TP" TP 4787,1377 r90 top
TP23 "TP" TP 4700,2700 r90 top
TP24 "TP" TP 1100,4300 r90 top
TP25 "TP" TP 3100,4000 r90 top
TP26 "TP" TP 1700,3000 r90 top
TP27 "TP" TP 4300,2200 r90 top
TP28 "TP" TP 3200,4600 r90 top
TP29 "TP" TP 3200,4000 r90 top
TP30 "TP" TP 3300,4000 r90 top
U1 "M3" CPGA-84 3765,4820 r270 top
U2 "PINT" CPGA-65 2005,4820 r270 top
U3 "FDC6330L" SUPERSOT-6 1691,3788 r180 top
U4 "LTC3589" QFN-40 2898.43,1473.35 r270 top
U5 "SI1035X" SC-89-6 2419,2031 r270 top
U6 "SI1035X" SC-89-6 2369,1991 r90 top
U7 "SN74AUP1G126" SOT-753 2249,1976 r90 top
U8 "TS5A4594" SOT25 3556,1341.17 r90 bottom
U9 "CP2102" QFN-28 1710,1430 r0 top
U10 "USBLC6-2" SOT23-6_L 1580,1412.56 r0 top
U11 "SI1035X" SC-89-6 3100,2035.63 r90 top
U12 "SI1035X" SC-89-6 3150,2075 r270 top
U13 "SN74AUP1G126" SOT-753 3270,2090 r270 top
U14 "SI1035X" SC-89-6 3100,1805 r90 top
U15 "SI1035X" SC-89-6 3150,1845 r270 top
U16 "SN74AUP1G126" SOT-753 3270,1860 r270 top
U17 "TS5A4594" SOT25 3556,1171.17 r90 bottom
U18 "TS5A4594" SOT25 3556,1511.17 r90 bottom
X1 "ASE-20.000MHZ-LC-T" CRYSTAL_3.2mm_2.5mm 1983,2332 r0 top

## Footprints (in the part's own frame and the unit in brackets; to place one, negate y for a bottom-side part, rotate by r counter-clockwise, add the part's x,y. Pads: shape width x height; smd on the part's side, far side on the other; paste and mask are expansions set on the pad)
0402 [mm] "Chip Capacitor, Body 1.0x0.5mm, IPC High Density"
  rect 0.6x0.5 smd: 1(-0.5,0) 2(0.5,0)
  body extent -0.55,-0.3 0.55,0.3, height 1.3
0603 [mm] "Chip Capacitor, Body 1.6x0.8mm, IPC High Density"
  rect 0.8x0.9 smd: 1(-0.7,0) 2(0.7,0)
  body extent -0.87,-0.48 0.87,0.48, height 1.3
0805 [mm] "Chip Resistor, Body 2.0x1.2mm, IPC High Density"
  rect 1x1.3 smd: 1(-0.8,0) 2(0.8,0)
  silkscreen extent 0,-0.55 0,0.55, body extent -1.07,-0.7 1.07,0.7, height 0.7
1206_LED [mm] "Chip Capacitor, Body 3.2x1.6mm, IPC High Density"
  rect 1.1x1.7 smd: 1(-1.35,0) 2(1.35,0)
  silkscreen extent -0.4,-0.89 2.16,0.89, body extent -1.7,-0.9 1.7,0.9, height 1.3
1210 [mm] "Chip Resistor, Body 3.2x2.5mm, IPC High Density"
  rect 1.1x2.6 smd: 1(-1.35,0) 2(1.35,0)
  silkscreen extent -0.4,-1.2 0.4,1.2, body extent -1.68,-1.32 1.68,1.32, height 0.9
1608[0603] [mm] "Chip Capacitor, Body 1.6x0.8mm, IPC High Density"
  rect 0.8x0.9 smd: 1(-0.7,0) 2(0.7,0)
  body extent -0.87,-0.48 0.87,0.48, height 1.3
CPGA-65 [mil]
  round 60 hole 35: A1(0,900) A2(100,900) A3(200,900) A4(300,900) A5(400,900) A6(500,900) A7(600,900) A8(700,900) A9(800,900) A10(900,900) B1(0,800) B2(100,800) B3(200,800) B4(300,800) B5(400,800) B6(500,800) B7(600,800) B8(700,800) B9(800,800) B10(900,800) C1(0,700) C2(100,700) C3(200,700) C9(800,700) C10(900,700) D1(0,600) D2(100,600) D9(800,600) D10(900,600) E1(0,500) E2(100,500) E9(800,500) E10(900,500) F1(0,400) F2(100,400) F9(800,400) F10(900,400) G1(0,300) G2(100,300) G9(800,300) G10(900,300) H1(0,200) H2(100,200) H9(800,200) H10(900,200) J1(0,100) J2(100,100) J3(200,100) J4(300,100) J5(400,100) J6(500,100) J7(600,100) J8(700,100) J9(800,100) J10(900,100) K1(0,0) K2(100,0) K3(200,0) K4(300,0) K5(400,0) K6(500,0) K7(600,0) K8(700,0) K9(800,0) K10(900,0)
  silkscreen extent -500,-333 1201,1025
CPGA-84 [mil]
  round 60 hole 35: A1(0,1000) A2(100,1000) A3(200,1000) A4(300,1000) A5(400,1000) A6(500,1000) A7(600,1000) A8(700,1000) A9(800,1000) A10(900,1000) A11(1000,1000) B1(0,900) B2(100,900) B3(200,900) B4(300,900) B5(400,900) B6(500,900) B7(600,900) B8(700,900) B9(800,900) B10(900,900) B11(1000,900) C1(0,800) C2(100,800) C3(200,800) C5(400,800) C6(500,800) C7(600,800) C10(900,800) C11(1000,800) D1(0,700) D2(100,700) D10(900,700) D11(1000,700) E1(0,600) E2(100,600) E3(200,600) E9(800,600) E10(900,600) E11(1000,600) F1(0,500) F2(100,500) F3(200,500) F9(800,500) F10(900,500) F11(1000,500) G1(0,400) G2(100,400) G3(200,400) G9(800,400) G10(900,400) G11(1000,400) H1(0,300) H2(100,300) H10(900,300) H11(1000,300) J1(0,200) J2(100,200) J5(400,200) J6(500,200) J7(600,200) J10(900,200) J11(1000,200) K1(0,100) K2(100,100) K3(200,100) K4(300,100) K5(400,100) K6(500,100) K7(600,100) K8(700,100) K9(800,100) K10(900,100) K11(1000,100) L1(0,0) L2(100,0) L3(200,0) L4(300,0) L5(400,0) L6(500,0) L7(600,0) L8(700,0) L9(800,0) L10(900,0) L11(1000,0)
  silkscreen extent -500,-333 1299,1125
CRYSTAL_3.2mm_2.5mm [mm]
  rect 1.3x1.1 smd: 1(0,0) 2(2.1,0) 3(2.1,1.65) 4(0,1.65)
  silkscreen extent -0.64,-1.16 2.73,2.16
DIP-8 [mm] "DIP; 8 Leads; Row Spacing 7.62 mm; Pitch 2.54 mm"
  rect 1.5x1.5 hole 0.9: 1(-3.81,3.81)
  round 1.5 hole 0.9: 2(-3.81,1.27) 3(-3.81,-1.27) 4(-3.81,-3.81) 5(3.81,-3.81) 6(3.81,-1.27) 7(3.81,1.27) 8(3.81,3.81)
  silkscreen extent -3.94,-5.15 2.65,5.23, body extent -3.6,-5.15 3.6,5.15, height 5.08
EVQPA [mm]
  round 1.5 hole 1: 1(0,6.5) 1(0,0) 2(4.5,6.5) 2(4.5,0)
  silkscreen extent -0.75,0.25 5.25,6.25
Ferrite_Bead_3.2mm_1.6mm [mm]
  rect 1.1x1.4 smd: 1(0,0) 2(3.3,0)
  silkscreen extent 0,-0.8 3.3,0.8
HDR1X2 [mm] "Connector; Header; 2 Position"
  rect 1.5x1.5 hole 0.9: 1(0,0)
  round 1.5 hole 0.9: 2(2.54,0)
  silkscreen extent -1.27,-1.27 3.81,1.27
HDR2X2 [mm] "Connector; Header; 2x2 Position"
  rect 1.5x1.5 hole 0.9: 1(0,0)
  round 1.5 hole 0.9: 2(0,2.54) 3(2.54,0) 4(2.54,2.54)
  silkscreen extent -1.27,-1.27 3.81,3.81
HDR2X3 [mm] "Connector; Header; 3x2 Position"
  rect 1.5x1.5 hole 0.9: 1(0,0)
  round 1.5 hole 0.9: 2(0,2.54) 3(2.54,0) 4(2.54,2.54) 5(5.08,0) 6(5.08,2.54)
  silkscreen extent -1.27,-1.27 6.35,3.81
HDR2X4 [mm] "Connector; Header; 4x2 Position"
  rect 1.5x1.5 hole 0.9: 1(0,0)
  round 1.5 hole 0.9: 2(0,2.54) 3(2.54,0) 4(2.54,2.54) 5(5.08,0) 6(5.08,2.54) 7(7.62,0) 8(7.62,2.54)
  silkscreen extent -1.27,-1.27 8.89,3.81
HDR2X5 [mm] "Connector; Header; 5x2 Position"
  rect 1.5x1.5 hole 0.9: 1(0,0)
  round 1.5 hole 0.9: 2(0,2.54) 3(2.54,0) 4(2.54,2.54) 5(5.08,0) 6(5.08,2.54) 7(7.62,0) 8(7.62,2.54) 9(10.16,0) 10(10.16,2.54)
  silkscreen extent -1.27,-1.27 11.43,3.81
HDR2X8 [mm] "Connector; Header; 8x2 Position"
  rect 1.5x1.5 hole 0.9: 1(0,0)
  round 1.5 hole 0.9: 2(0,2.54) 3(2.54,0) 4(2.54,2.54) 5(5.08,0) 6(5.08,2.54) 7(7.62,0) 8(7.62,2.54) 9(10.16,0) 10(10.16,2.54) 11(12.7,0) 12(12.7,2.54) 13(15.24,0) 14(15.24,2.54) 15(17.78,0) 16(17.78,2.54)
  silkscreen extent -1.27,-1.27 19.05,3.81
HDR2X24 [mm] "Connector; Header; 24x2 Position"
  rect 1.5x1.5 hole 0.9: 1(0,0)
  round 1.5 hole 0.9: 2(0,2.54) 3(2.54,0) 4(2.54,2.54) 5(5.08,0) 6(5.08,2.54) 7(7.62,0) 8(7.62,2.54) 9(10.16,0) 10(10.16,2.54) 11(12.7,0) 12(12.7,2.54) 13(15.24,0) 14(15.24,2.54) 15(17.78,0) 16(17.78,2.54) 17(20.32,0) 18(20.32,2.54) 19(22.86,0) 20(22.86,2.54) 21(25.4,0) 22(25.4,2.54) 23(27.94,0) 24(27.94,2.54) 25(30.48,0) 26(30.48,2.54) 27(33.02,0) 28(33.02,2.54) 29(35.56,0) 30(35.56,2.54) 31(38.1,0) 32(38.1,2.54) 33(40.64,0) 34(40.64,2.54) 35(43.18,0) 36(43.18,2.54) 37(45.72,0) 38(45.72,2.54) 39(48.26,0) 40(48.26,2.54) 41(50.8,0) 42(50.8,2.54) 43(53.34,0) 44(53.34,2.54) 45(55.88,0) 46(55.88,2.54) 47(58.42,0) 48(58.42,2.54)
  silkscreen extent -1.27,-1.27 59.69,3.81
HDR3x2 [mm]
  round 1.5 hole 0.9: 1(0,0) 2(2.54,0) 3(5.08,0) 4(0,-2.54) 5(2.54,-2.54) 6(5.08,-2.54)
  silkscreen extent -1.27,-3.81 6.35,1.27
INDUCTOR_.118x.142mm [mm]
  rect 1.5x1.2 smd: 1(-1.35,0) 2(1.35,0)
  silkscreen extent -1.8,-1.5 1.8,1.5
QFN-28 [mm]
  rect 0.9x0.3 smd: 1(0,0) 2(0,-0.5) 3(0,-1) 4(0,-1.5) 5(0,-2) 6(0,-2.5) 7(0,-3) 15(4.8,-3) 16(4.8,-2.5) 17(4.8,-2) 18(4.8,-1.5) 19(4.8,-1) 20(4.8,-0.5) 21(4.8,0)
  rect 0.3x0.9 smd: 8(0.9,-3.9) 9(1.4,-3.9) 10(1.9,-3.9) 11(2.4,-3.9) 12(2.9,-3.9) 13(3.4,-3.9) 14(3.9,-3.9) 22(3.9,0.9) 23(3.4,0.9) 24(2.9,0.9) 25(2.4,0.9) 26(1.9,0.9) 27(1.4,0.9) 28(0.9,0.9)
  rect 3.2x3.2 smd: 29(2.4,-1.5)
  silkscreen extent -0.76,-4 4.9,1.01
QFN-40 [mm]
  rect 0.7x0.25 smd: 1(0,0) 2(0,-0.5) 3(0,-1) 4(0,-1.5) 5(0,-2) 6(0,-2.5) 7(0,-3) 8(0,-3.5) 9(0,-4) 10(0,-4.5) 21(5.8,-4.5) 22(5.8,-4) 23(5.8,-3.5) 24(5.8,-3) 25(5.8,-2.5) 26(5.8,-2) 27(5.8,-1.5) 28(5.8,-1) 29(5.8,-0.5) 30(5.8,0)
  rect 0.25x0.7 smd: 11(0.65,-5.15) 12(1.15,-5.15) 13(1.65,-5.15) 14(2.15,-5.15) 15(2.65,-5.15) 16(3.15,-5.15) 17(3.65,-5.15) 18(4.15,-5.15) 19(4.65,-5.15) 20(5.15,-5.15) 31(5.15,0.65) 32(4.65,0.65) 33(4.15,0.65) 34(3.65,0.65) 35(3.15,0.65) 36(2.65,0.65) 37(2.15,0.65) 38(1.65,0.65) 39(1.15,0.65) 40(0.65,0.65)
  rect 4.42x4.42 smd: 41(2.9,-2.25)
  silkscreen extent -0.76,-5.25 5.9,0.89
SC-89-6 [mm]
  rect 0.3x0.6 smd: 1(0,0) 2(0.5,0) 3(1,0) 4(1,1.4) 5(0.5,1.4) 6(0,1.4)
  silkscreen extent -0.76,-0.25 1.3,1.3
SOT23-6_L [mm] "SOT23, 6-Leads, Body 2.9x1.6mm, Pitch 0.95mm, Lead Span 2.7mm, IPC High Density"
  rect 0.9x0.65 smd: 1(-1.2,0.95) 2(-1.2,0) 3(-1.2,-0.95) 4(1.2,-0.95) 5(1.2,0) 6(1.2,0.95)
  silkscreen extent -1.32,-1.55 0.35,1.95, body extent -0.9,-1.55 0.9,1.55, height 1.45
SOT25 [mm]
  rect 0.6x1.05 smd: 1(0,0) 2(0.95,0) 3(1.9,0) 4(1.9,2.7) 5(0,2.7)
  silkscreen extent -0.88,-0.25 2.5,2.2
SOT-23_N [mm] "SOT23, 3-Leads, Body 2.9x1.3mm, Pitch 0.95mm, Lead Span 2.5mm, IPC Medium Density"
  rect 1.15x0.6 smd: 1(-1.125,0.95) 2(-1.125,-0.95) 3(1.125,0)
  silkscreen extent -1.25,-1.5 0.7,1.92, body extent -0.7,-1.5 0.7,1.5, height 1.1
SOT-753 [mm]
  rect 0.6x1.05 smd: 1(0,0) 2(0.95,0) 3(1.9,0) 4(1.9,2.7) 5(0,2.7)
  silkscreen extent -0.87,-0.36 2.47,2.22
SPDT_SW2 [mm]
  round 1.3 hole 0.8: 1(0,0) 2(2,0) 3(4,0)
  round 2.2 hole 1.5: 4(-2.1,0) 4(6.1,0)
  silkscreen extent -2.3,-2.15 6.3,2.15
SUPERSOT-6 [mm] "SOT23, 6-Leads, Body 2.9x1.6mm, Pitch 0.95mm, Lead Span 2.7mm, IPC High Density"
  rect 1x0.65 smd: 1(-1.3,0.95) 2(-1.3,0) 3(-1.3,-0.95) 4(1.3,-0.95) 5(1.3,0) 6(1.3,0.95)
  silkscreen extent -1.33,-1.55 0.35,1.95, body extent -0.9,-1.55 0.9,1.55, height 1.45
TP [mm]
  round 1.5 hole 0.9: 1(0,0)
  silkscreen extent -1.02,-1.02 1.02,1.02
TSOP-6 [mm]
  rect 0.508x0.9 smd: 1(0,0) 2(1,0) 3(2,0) 4(2,2.325) 5(1,2.325) 6(0,2.325)
  silkscreen extent -1.01,-0.13 2.5,1.98
"USB Mini-B" [mm]
  rect 0.5x2 smd: 1(0,0) 2(0.8,0) 3(1.6,0) 4(2.4,0) 5(3.2,0)
  rect 2.2x2.5 smd: 6(-2.6,-0.25) 7(5.8,-0.25) 8(-2.6,-5.5) 9(5.8,-5.5)
  silkscreen extent -2.25,-8.65 5.45,1.01
USB_HORIZONTAL [mm]
  round 1.4 hole 0.92: 1(0,0) 2(2.5,0) 3(4.5,0) 4(7,0)
  round 3 hole 2.33: 5(-3.07,-2.71) 5(10.07,-2.71)
  silkscreen extent -3.07,-12.99 10.07,1.6, body extent -3.05,-12.95 10.03,1.52, height 7.01
VQ100_N [mm] "Thin QFP, 100-Leads, Body 14x14mm, Pitch 0.5mm, IPC Medium Density"
  oval 1.8x0.3 smd: 1(-7.55,6) 2(-7.55,5.5) 3(-7.55,5) 4(-7.55,4.5) 5(-7.55,4) 6(-7.55,3.5) 7(-7.55,3) 8(-7.55,2.5) 9(-7.55,2) 10(-7.55,1.5) 11(-7.55,1) 12(-7.55,0.5) 13(-7.55,0) 14(-7.55,-0.5) 15(-7.55,-1) 16(-7.55,-1.5) 17(-7.55,-2) 18(-7.55,-2.5) 19(-7.55,-3) 20(-7.55,-3.5) 21(-7.55,-4) 22(-7.55,-4.5) 23(-7.55,-5) 24(-7.55,-5.5) 25(-7.55,-6) 51(7.55,-6) 52(7.55,-5.5) 53(7.55,-5) 54(7.55,-4.5) 55(7.55,-4) 56(7.55,-3.5) 57(7.55,-3) 58(7.55,-2.5) 59(7.55,-2) 60(7.55,-1.5) 61(7.55,-1) 62(7.55,-0.5) 63(7.55,0) 64(7.55,0.5) 65(7.55,1) 66(7.55,1.5) 67(7.55,2) 68(7.55,2.5) 69(7.55,3) 70(7.55,3.5) 71(7.55,4) 72(7.55,4.5) 73(7.55,5) 74(7.55,5.5) 75(7.55,6)
  oval 0.3x1.8 smd: 26(-6,-7.55) 27(-5.5,-7.55) 28(-5,-7.55) 29(-4.5,-7.55) 30(-4,-7.55) 31(-3.5,-7.55) 32(-3,-7.55) 33(-2.5,-7.55) 34(-2,-7.55) 35(-1.5,-7.55) 36(-1,-7.55) 37(-0.5,-7.55) 38(0,-7.55) 39(0.5,-7.55) 40(1,-7.55) 41(1.5,-7.55) 42(2,-7.55) 43(2.5,-7.55) 44(3,-7.55) 45(3.5,-7.55) 46(4,-7.55) 47(4.5,-7.55) 48(5,-7.55) 49(5.5,-7.55) 50(6,-7.55) 76(6,7.55) 77(5.5,7.55) 78(5,7.55) 79(4.5,7.55) 80(4,7.55) 81(3.5,7.55) 82(3,7.55) 83(2.5,7.55) 84(2,7.55) 85(1.5,7.55) 86(1,7.55) 87(0.5,7.55) 88(0,7.55) 89(-0.5,7.55) 90(-1,7.55) 91(-1.5,7.55) 92(-2,7.55) 93(-2.5,7.55) 94(-3,7.55) 95(-3.5,7.55) 96(-4,7.55) 97(-4.5,7.55) 98(-5,7.55) 99(-5.5,7.55) 100(-6,7.55)
  silkscreen extent -7.67,-6.25 6.25,6.82, body extent -7,-7 7,7, height 1.2

## Part data
C1 C2 C3 C4 C5 C6 C7 C8 C9 C10 C11 C12 C13 C14 C15 C16 C17 C18 C19 C20 C21 C22 C23 C24 C25 C26 C27 C28 C29 C30 C31 C32 C33 C34 C35 C36 C37 C38 C39 C40 C41 C42 C43 C44 C45 C46 C47 C48 C49 C50 C51 C52 C53 C54 C55 C56 C57 C58 C59 C60 C61 C62 C63 C64 C65: "Capacitor (Semiconductor SIM Model)"
D2: library part "Diode BAT18", "Low-Loss RF Switching Diode"
DIP1: "4-DIP Switch"
F1: "IGLOO nano Low-Power Flash 1.2 to 1.5V FPGA with Flash*Freeze, 68 User IOs, 250K System Gates, 1Kbit Flash ROM, 100-Pin TQFP, Commercial Grade, Pb-Free"
F2: library part "Fuse MICROSMD050F-2", "POLYSWITCH 0.50A RESET FUSE SMD"
FB1: library part "Ferrite Bead HF30ACC321611-T"
H2: library part UX60-MB-5ST, "USB mini-B"
I1 I2 I3 I4: library part IHLP1212
P1: "Header, 5-Pin, Dual row"
P2 P10 P15: "Header, 4-Pin, Dual row"
P4: "Header, 2-Pin, Dual row"
P5: "Header, 3-Pin, Dual row"
P6: "Header, 24-Pin, Dual row"
P8 P11 P12 P16: "Header, 2-Pin"
P9: "Header, 8-Pin, Dual row"
Q2: "P-Channel MOSFET"
R1 R2 R3 R4 R5 R6 R7 R8 R9 R10 R11 R12 R13 R14 R15 R16 R17 R18 R19 R20 R21 R22 R23 R24 R25 R26 R27 R28 R29 R30 R31 R32 R33 R34 R35 R36 R37 R38 R39 R40 R41 R42 R43 R44 R45 R46 R47 R48 R49 R50 R51 R52 R53 R54 R55 R56 R57 R58 R59 R60 R61 R62 R63 R64 R65 R66 R67 R68 R69 R70 R71 R72 R73 R74 R75 R76 R79 R80 R81 R82 R83 R84 R85 R86 R87 R88 R89 R90 R91 R92 R93 R94 R98 R99: "Semiconductor Resistor"
S1 S2 S3 S4: "Switch Push"
S5 S6 S7: "SPDT Slide Switch"
U3: "HS Switch"
U5 U6 U11 U12 U14 U15: "Complementary N- and P-Channel 20 V (D-S) MOSFET"
U7 U13 U16: "LOW-POWER SINGLE BUS BUFFER GATE WITH 3-STATE OUTPUT"
U8 U17 U18: "SPST Analog Switch"
U10: "USB ESD Protection"

## Via types
v1: diameter 40, hole 20, Top Layer to Bottom Layer, 95 vias
v2: diameter 30, hole 15, Top Layer to Bottom Layer, 40 vias
v3: diameter 30, hole 15, Top Layer to Bottom Layer, tented bottom, 6 vias
v4: diameter 200, hole 120, Top Layer to Bottom Layer, 4 vias

## Nets (pads, with @x,y where several pads share a name; then routed paths per layer and width w, separated by ;. In a path a pad name is that pad's centre, name@x,y a point inside that pad or via, vN(x,y) a via of type N, cw(c..) or ccw(c..) an arc to the next point about the centre after c; other vN are vias at no path point)
DISCRETE_SCL: P7.6 U12.6 U13.2 | length 1843.8
  Top Layer w7: v3(3180,2105) 3205.12,2079.88 U12.6@3205.12,2075 3237.67,2075 3260.07,2052.6 U13.2@3270,2052.6
  Bottom Layer w7: v3(3180,2105) 3180,2480 3125,2535 3125,3103.13 3058,3170.13 3058,3498 3115,3555 3260,3555 P7.6@3302.5,3597.5
DISCRETE_SCL_BUF: F1.23 U13.4 | length 655.3
  Top Layer w10: F1.23@2846.85,2222.76 2846.85,2173.15 2870,2150 3260,2150 3310,2100 3310,2081.5 U13.4@3376.3,2015.2
DISCRETE_SDA: P7.3 U15.6 U16.2 | length 2201.7
  Top Layer w7: v3(3180,1875) 3205.12,1849.88 U15.6@3205.12,1845 3237.67,1845 3260.07,1822.6 U16.2@3270,1822.6
  Bottom Layer w7: v3(3180,1875) 3042,2013 3042,3607 3085,3650 3255,3650 P7.3@3302.5,3697.5
DISCRETE_SDA_BUF: F1.19 U16.4 | length 875.8
  Top Layer w10: F1.19@2768.11,2222.76 2768.11,2093.81 2941.92,1920 3260,1920 3310,1870 3310,1851.5 U16.4@3376.3,1785.2
DISCRETE_SPARE: P12.2 U6.6 U7.2 | length 2861.1
  Top Layer w10: U7.2@2249,2013.4 2272.6,2013.4 2283.8,2002.2 ; v1(2308,2075) 2283.8,2050.8 2283.8,2002.2 ; U6.6@2313.88,1991 2295,1991 2283.8,2002.2
  Bottom Layer w10: v1@2307,2065 2236,2065 2140,2161 2140,2802 2418,3080 2869,3080 2949,3160 2949,3643 3064,3758 3258,3758 P12.2@3300,3800
DISCRETE_SPARE_BUF: F1.7 U7.4 | length 521.6
  Top Layer w7: 2130,2063.5 2130,2118 2154.78,2142.78 2188.54,2142.78 2188.75,2143 2203.24,2143 2203.46,2142.78 2488.78,2142.78 2531.89,2185.89 F1.7@2531.89,2222.76
FPGA_IO_0: F1.63 P6.1 | length 545.3
  Top Layer w10: P6.1@2300,3200 2330,3200 2650,2880 F1.63@2650,2817.24
FPGA_IO_1: F1.62 P6.3 | length 493
  Top Layer w10: P6.3@2397.5,3197.5 2669.68,2925.32 F1.62@2669.68,2817.24
FPGA_IO_2: F1.61 P6.5 | length 459.7
  Top Layer w10: P6.5@2497.5,3197.5 2689.37,3005.63 F1.61@2689.37,2817.24
FPGA_IO_3: F1.60 P6.7 | length 427.9
  Top Layer w10: P6.7@2600,3200 2709.06,3090.94 F1.60@2709.06,2817.24
FPGA_IO_4: F1.59 P6.9 | length 394.7
  Top Layer w10: P6.9@2700,3200 2728.74,3171.26 F1.59@2728.74,2817.24
FPGA_IO_5: F1.58 P6.11 | length 404.1
  Top Layer w10: F1.58@2748.43,2817.24 2748.43,3148.43 P6.11@2800,3200
FPGA_IO_6: F1.57 P6.13 | length 437.4
  Top Layer w10: F1.57@2768.11,2817.24 2768.11,3068.11 P6.13@2900,3200
FPGA_IO_7: F1.45 P6.15 | length 826.6
  Top Layer w10: F1.45@2949.02,2659.57 3014.57,2659.57 3210,2855 3210,3080 3185,3105 3095,3105 P6.15@3000,3200
FPGA_IO_8: F1.44 P6.17 | length 761.9
  Top Layer w10: F1.44@2947.24,2638.11 3018.11,2638.11 3230,2850 3230,3085 3130,3185 P6.17@3115,3185
FPGA_IO_9: F1.43 P6.19 | length 772.3
  Top Layer w10: F1.43@2947.24,2618.43 3023.43,2618.43 3250,2845 3250,3150 P6.19@3200,3200
FPGA_IO_10: F1.42 P6.21 | length 795.1
  Top Layer w10: F1.42@2947.24,2598.74 3028.74,2598.74 3300,2870 P6.21@3300,3200
FPGA_IO_11: F1.41 P6.23 | length 859.3
  Top Layer w10: F1.41@2947.24,2579.06 3034.06,2579.06 3400,2945 P6.23@3400,3200
FPGA_IO_12: F1.40 P6.25 | length 923.6
  Top Layer w10: F1.40@2947.24,2559.37 3039.37,2559.37 3500,3020 P6.25@3500,3200
FPGA_IO_13: F1.36 P6.27 | length 1013.4
  Top Layer w10: F1.36@2947.24,2480.63 2987.55,2480.63 3600,3093.08 P6.27@3600,3200
FPGA_IO_14: F1.35 P6.29 | length 1077
  Top Layer w10: F1.35@2947.24,2460.94 2991.9,2460.94 3700,3169.04 P6.29@3700,3200
FPGA_IO_15: F1.34 P6.31 | length 1167
  Top Layer w10: F1.34@2947.24,2441.26 2996.26,2441.26 3715,3160 3760,3160 P6.31@3800,3200
FPGA_IO_16: F1.33 P6.33 | length 1275.2
  Top Layer w10: F1.33@2947.24,2421.57 3001.57,2421.57 3720,3140 3840,3140 P6.33@3900,3200
FPGA_IO_17: F1.32 P6.35 | length 1383.3
  Top Layer w10: F1.32@2947.24,2401.89 3006.89,2401.89 3725,3120 3920,3120 P6.35@4000,3200
FPGA_IO_18: F1.31 P6.37 | length 1503.6
  Top Layer w10: F1.31@2947.24,2382.2 3012.2,2382.2 3730,3100 4005,3100 P6.37@4110,3205
FPGA_IO_19: F1.30 P6.39 | length 1603.2
  Top Layer w10: F1.30@2947.24,2362.52 3017.52,2362.52 3735,3080 4080,3080 P6.39@4202.5,3202.5
FPGA_IO_20: F1.29 P6.41 | length 1707.8
  Top Layer w10: F1.29@2947.24,2342.83 3022.83,2342.83 3740,3060 4160,3060 P6.41@4300,3200
FPGA_IO_21: F1.28 P6.43 | length 1816
  Top Layer w10: F1.28@2947.24,2323.15 3028.15,2323.15 3745,3040 4240,3040 P6.43@4400,3200
FPGA_IO_22: F1.27 P6.45 | length 1924.1
  Top Layer w10: F1.27@2947.24,2303.46 3033.46,2303.46 3750,3020 4320,3020 P6.45@4500,3200
FPGA_IO_23: F1.26 P6.47 | length 2032.3
  Top Layer w10: F1.26@2947.24,2283.78 3038.78,2283.78 3755,3000 4400,3000 P6.47@4600,3200
FPGA_PINT_CLK: F1.69 R81.1 | length 897
  Top Layer w10: R81.1@2165,3512.44 2211,3466.44 2211,3139 2350,3000 2435,3000 2531.89,2903.11 F1.69@2531.89,2817.24
FPGA_PINT_RDDATA: F1.71 R83.1 | length 928.9
  Top Layer w10: R83.1@2055,3512.44 2059.56,3512.44 2177,3395.01 2177,3123 2340,2960 2425,2960 2492.52,2892.48 F1.71@2492.52,2817.24
FPGA_PINT_RDRDY: F1.70 R82.1 | length 911.6
  Top Layer w10: R82.1@2110,3512.44 2194,3428.44 2194,3131 2345,2980 2430,2980 2512.2,2897.8 F1.70@2512.2,2817.24
FPGA_PINT_RDREQ: F1.72 R84.1 | length 944.9
  Top Layer w10: R84.1@2000,3512.44 2047.44,3465 2060,3465 2160,3365 2160,3115 2335,2940 2414.3,2940 2472.83,2881.46 F1.72@2472.83,2817.24
FPGA_PINT_RESETN: F1.73 R85.1 | length 977.6
  Top Layer w10: R85.1@1945,3512.44 2012.44,3445 2055,3445 2143,3357 2143,3107 2328,2922 2408.25,2922 2453.15,2877.11 F1.73@2453.15,2817.24
FPGA_PINT_WRDATA: F1.65 R80.1 | length 908.6
  Top Layer w10: R80.1@2220,3512.44 2230,3502.44 2230,3145 2355,3020 2443.04,3020 2610.63,2852.41 F1.65@2610.63,2817.24
FPGA_PINT_WRREQ: F1.64 R79.1 | length 914.1
  Top Layer w10: R79.1@2275,3512.44 2250,3487.44 2250,3150 2360,3040 2447.08,3040 2630.32,2856.77 F1.64@2630.32,2817.24
FPGA_SPI_CLKOUT: P15.3
FPGA_SPI_FSSOUT: P15.5
FPGA_SPI_RXD: P15.7
FPGA_SPI_TXD: P15.1
GND: C1.1 C2.1 C3.1 C4.1 C5.1 C6.1 C7.1 C8.1 C9.1 C10.1 C11.1 C12.1 C13.1 C14.1 C15.1 C16.1 C17.1 C18.1 C19.1 C20.1 C21.1 C22.1 C23.1 C24.1 C26.1 C27.1 C29.1 C30.2 C31.1 C32.1 C33.2 C34.1 C35.1 C37.2 C38.1 C39.2 C40.2 C42.2 C43.2 C45.2 C46.1 C47.1 C50.1 C51.1 C52.1 C53.1 C54.1 C55.1 C56.1 C57.1 C58.1 C59.1 C60.1 C61.2 C62.1 C63.1 C64.1 C65.2 D2.1 DIP1.5 DIP1.6 DIP1.7 DIP1.8 F1.1 F1.9 F1.12 F1.25 F1.38 F1.46 F1.51 F1.67 F1.75 F1.88 F1.99 H2.5 H2.6 H2.7 H2.8 H2.9 P1.2 P1.10 P3.4 P3.5 R4.2 R5.1 R6.1 R7.1 R8.1 R10.2 R11.2 R13.1 R14.1 R16.1 R43.2 R45.1 R46.2 R48.2 R50.2 R52.1 R53.2 R54.1 R56.2 R57.2 R63.1 R64.1 R94.2 R98.1 S1.2 S2.2 S3.2 S4.2 TP20.1 TP22.1 TP23.1 TP24.1 TP26.1 TP28.1 U1.C5 U1.F2 U2.B5 U2.J6 U4.9 U4.10 U4.11 U4.13 U4.41 U5.1 U7.3 U8.3 U9.3 U9.29 U10.2 U11.1 U13.3 U14.1 U16.3 U17.3 U18.3 X1.2 | length 7044.4
  Top Layer w7: U4.13@2695.67,1408.39 2760.63,1408.39 U4.41@2740.94,1428.07 ; U4.11@2695.67,1447.76 2721.26,1447.76 ; U4.10@2721.26,1473.35 2721.26,1447.76 ; U4.9@2740.94,1473.35 U4.41@2740.94,1428.07 ; v2(2845,1640) 2845,1634.69 C63.1@2880,1599.68 ; v2@2845,1644.69 R57.2@2880,1679.69 ; v2@2850,1640 v2@2850,1644.69 ; R57.2@2885,1679.69 C62.1@2935,1679.68 2914.66,1659.34 2914.66,1620.03 R56.2@2935,1599.69 ; R53.2@3054.69,1410 3054.69,1410.87 3074.15,1430.34 3085.34,1430.34 3115,1460 v2@3115,1465 ; R50.2@3054.69,1510 C38.1@3054.69,1556.81 ; 2721.26,1447.76 U4.41@2740.94,1428.07
  Top Layer w10: R8.1@1014.44,3578 R7.1@1014.44,3488 R6.1@1014.44,3398 R5.1@1014.44,3308 1014.44,3245.56 DIP1.5@1070,3190 ; v1(1015,1225) H2.9@1056.81,1225 ; v1(1050,1660) 1117.64,1592.36 H2.6@1330.16,1592.36 ; H2.9@1116.65,1261.65 1330.16,1261.65 1340,1271.5 H2.5@1340,1364.02 ; v1(1482.56,1412.56) U10.2@1532.76,1412.56 ; TP20.1@1700,1100 1779.56,1020.44 R98.1@1964,1020.44 ; U9.3@1710,1390.63 U9.29@1784.8,1390.63 ; R64.1@1725,1897.56 1759.84,1932.4 D2.1@1855.71,1932.4 ; v1(1859,2340) 1907.44,2340 C1.1@1908,2339.44 1962.44,2285 2018.68,2285 X1.2@2065.68,2332 ; C53.1@2000,1785.12 C53.1@2010.12,1785.12 ; U7.3@2255,2056.8 v1(2255,2100) ; v1(2335,2835) 2352.76,2817.24 F1.75@2413.78,2817.24 ; F1.99@2352.76,2303.46 2428.46,2303.46 2413.78,2288.78 F1.1@2413.78,2222.76 ; F1.88@2352.76,2520 2415,2520 v1(2430,2535) ; U5.1@2419,2031 2454,2066 v1(2466,2066) ; R46.2@2553.74,1088.35 v1@2553.74,1140 ; v1(2555,2305) 2571.26,2288.74 F1.9@2571.26,2222.76 ; v1(2570,2665) 2571.26,2666.26 F1.67@2571.26,2817.24 ; F1.12@2630.32,2222.76 2630.32,2280.32 v1(2655,2305) ; v1(2795,2520) F1.38@2947.24,2520 ; v1@2870,2305 2860,2295 2860,2285 2886.22,2258.78 F1.25@2886.22,2222.76 ; v1(2875,2675) 2877.48,2677.48 F1.46@2947.24,2677.48 ; F1.51@2886.22,2817.24 2886.22,2846.22 2915,2875 v1(2940,2875) ; C56.1@2985,1797.44 2997.44,1785 3080,1785 U14.1@3100,1805 ; C54.1@2997.44,2015 3080,2015 U11.1@3100,2035 ; v1(3070,1030) 3083.11,1043.11 R48.2@3083.11,1088.35 ; U16.3@3270,1785.2 3302.36,1785.2 C57.1@3352.56,1735 ; U13.3@3270,2015.2 3302.36,2015.2 C55.1@3352.56,1965
  Top Layer w15: R54.1@3056.68,1285 3066,1294.32 C45.2@3066,1320.31
  Top Layer w20: C50.1@1602.56,1292.56 v1(1637.44,1292.56) ; R63.1@1615,1785.12 C51.1@1560,1785.12 1560,1825 1632.56,1897.56 C52.1@1670,1897.56 R64.1@1725,1897.56 ; C47.1@1890,1785.12 C46.1@1945,1785.12 C53.1@2000,1785.12 ; C53.1@2010.12,1785.12 v1(2040,1815) ; C35.1@2378.5,1370 2382.44,1373.94 R45.1@2382.44,1435 ; C65.2@2417.44,1693.94 R4.2@2417.44,1745 ; R43.2@2555.31,1575 2555.31,1624.69 v1@2565.63,1635 ; R14.1@2555.31,1685.87 v1(2555.31,1635) v1@2565.63,1635 ; C27.1@2603.5,1635 v1@2565.63,1635
  Bottom Layer w10: v1(1482.56,1412.56) v1@1487.56,1412.56 ; v1(2335,2835) C10.1@2387.44,2835 ; C6.1@2342.44,2475 2377.44,2510 2405,2510 v1(2430,2535) ; C8.1@2360,2277.56 2402.56,2277.56 v1(2430,2305) ; C5.1@2547.56,2705 v1@2570,2682.56 ; v1(2570,2665) v1@2570,2682.56 ; C2.1@2590,2276.5 C2.1@2601.5,2276.5 ; C9.1@2592.44,2705 v1@2570,2682.56 ; v1(2635,2055) 2635,2087.44 C15.1@2655,2107.44 ; C3.1@2710,2272.56 2710,2275 v1(2740,2305) 2765,2280 C13.1@2765,2272.56 ; C20.1@2717.44,2875 v1@2797.44,2955 ; v1(2795,2520) v1@2812.56,2520 ; v1(2805,2955) 2837.56,2987.56 C19.1@2915,2987.56 ; v1@2812.56,2955 C18.1@2892.56,2875 ; C4.1@2835,2497.56 v1@2812.56,2520 ; C11.1@2835,2542.44 v1@2812.56,2520 ; v1(2875,2675) 2875,2717.56 C12.1@2897.44,2740 ; v1(2940,2875) 2942.44,2877.44 C17.1@2995,2877.44 ; v2(3443,1582) 3446.31,1585.31 U18.3@3555.33,1585.31 ; v2@3446.31,1243.31 U17.3@3555.33,1243.31 ; v2@3446.31,1414.31 U8.3@3555.33,1414.31 ; C22.1@4337.44,4490 4337.44,4492.56 v1(4305,4525) 4307.44,4525 C24.1@4337.44,4555 ; C21.1@4487.44,4490 4487.44,4492.56 v1(4455,4525) 4457.44,4525 C23.1@4487.44,4555 ; R11.2@4699,2633.56 TP23.1@4699,2699 ; R10.2@4892.56,2030 P1.10@4892.56,2092.56
  Bottom Layer w30: C40.2@2746.77,1350 v1(2773.43,1323.35) ; v1(2773.43,1398.35) 2783.43,1408.35 C33.2@2783.43,1451.85 ; v1@2843.43,1403.35 C43.2@2843.43,1451.85 ; v1(2848.43,1398.35) 2871.77,1375 C30.2@2903.5,1375 ; v1@2849.92,1398.35 C42.2@2903.43,1451.85
  other v1: 2570,1025 2555,1140 2848.43,1323.35 1775,1340 1835,1340 2345,1370 1775,1400 1835,1400 3085,1560 2380,1690 3385,1735 2949,1796 1596.28,1861.28 3385,1965 2985,1995 2534,2070 2855,2305 1641,3703 1728,3928 2605,4190 2275,4420 2635,4420
  other v2: 3443,1240 3055,1265 3443,1411 3118,1465 2267,1471 2267,1629
  other v4: 5000,1100
GOC_ON: F1.76 P10.7 U3.5 | length 1472.1
  Top Layer w10: U3.5@1639.82,3788 1635.82,3784 1603,3784 1590,3771 1590,3610 P10.7@1700,3500 1789.5,3410.5 1789.5,3175.25 2208.52,2756.22 F1.76@2352.76,2756.22
M3_0P6_SW: F1.98 U18.4 | length 2288.6
  Top Layer w7: F1.98@2352.76,2323.15 2308.15,2323.15 2262.5,2277.5 2183.3,2277.5 2094,2188.2 2094,1977.37 2233.37,1838 2737.6,1838 2844.6,1731 2974.6,1731 3034.6,1671 3610,1671 v2(3695,1586)
M3_1P2_SW: F1.97 U8.4 | length 2460.5
  Top Layer w7: F1.97@2352.76,2342.83 2306.83,2342.83 2255.5,2291.5 2177.5,2291.5 2080,2194 2080,1971.57 2227.57,1824 2731.8,1824 2838.8,1717 2968.8,1717 3028.8,1657 3554,1657 3617,1594 3617,1494 v2(3695,1416)
M3_VBATT_SW: F1.96 U17.4 | length 2657.8
  Top Layer w7: F1.96@2352.76,2362.52 2304.65,2362.52 2247.63,2305.5 2171.5,2305.5 2066,2200 2066,1965.77 2221.77,1810 2726,1810 2834,1702 2964,1702 3023,1643 3541,1643 3601,1583 3601,1340 v2(3695,1246)
M3_VCC_0P6: C22.2 P2.4 P4.4 U1.B5 U1.E2 | length 1482.2
  Top Layer w10: P4.4@3190,4700 3515,4700 3704,4889 4361,4889 4410,4840 4410,4765 U1.E2@4365,4720
  Bottom Layer w7: U1.B5@4640,4420 U1.B5@4665,4420
M3_VCC_1P2: C23.2 P2.6 P4.2 U1.A5 U1.D1 | length 2106.8
  Top Layer w10: P4.2@3190,4800 3572,4800 3687,4915 4359.04,4915 4454.04,4820 U1.D1@4465,4820
  Bottom Layer w10: U1.D1@4465,4820 4515,4770 4515,4582.56 C23.2@4542.56,4555 4557.56,4570 4805,4570 4820,4555 4820,4475 U1.A5@4765,4420
M3_VCC_BAT: C24.2 P2.8 U1.A6 U1.D2 U1.E3 | length 741.8
  Bottom Layer w7: C24.2@4392.56,4555 4420,4527.56 4420,4500 4459,4461 4689,4461 4715,4435 4715,4370 U1.A6@4765,4320
  Bottom Layer w10: C24.2@4392.56,4555 4392.56,4592.44 U1.E3@4365,4620 U1.D2@4465,4720
M3_VCC_SOL: C21.2 P2.2 U1.A4 U1.G3 | length 3414.1
  Top Layer w20: U1.G3@4165,4612.67 4307.67,4470 4715,4470 U1.A4@4765,4520
  Top Layer w40: P2.2@4300,2800 4370,2870 4905,2870 5080,3045 5080,4205 U1.A4@4765,4520
  Bottom Layer w7: C21.2@4542.56,4490 4557.56,4475 4720,4475 U1.A4@4765,4520
NetC25_1: C25.1 R15.2 R43.1 U4.39 | length 614.1
  Top Layer w7: U4.39@2924.02,1428.07 v2@2973.07,1428.07
  Top Layer w20: R43.1@2594.68,1575 v2(2615.32,1575) ; v2(2615.32,1575) R15.2@2630.31,1590 C25.1@2630.32,1560 v2(2615.32,1575)
  Bottom Layer w10: v2(2615.32,1575) 2625.32,1585 2900,1585 2980,1505 v2(2980,1435)
NetC28_1: C28.1 P3.1 U3.2 U3.3 | length 491.6
  Top Layer w20: P3.1@1489,4058 1656,4058 1765,3949 1765,3912.67 1750.68,3898.36 C28.1@1750.68,3873 1750.68,3796.5 U3.2@1742.18,3788
NetC28_2: C28.2 R12.2 U3.6 | length 197.1
  Top Layer w10: U3.6@1639.82,3750.6 1668.6,3750.6 1693.5,3775.5 1693.5,3873 ; R12.2@1675.69,3873 1693.5,3873 ; C28.2@1711.31,3873 1693.5,3873
NetC36_1: C36.1 R44.2 R46.1 U4.33 | length 628.3
  Top Layer w7: R46.1@2593.11,1088.35 2593.11,1113.11 v2(2595,1115) 2597,1113 2619.08,1113 R44.2@2628.74,1103.35 C36.1@2628.74,1073.35 ; U4.33@2924.02,1309.96 v2@2960.04,1309.96
  Bottom Layer w7: v2@2595,1125 v2(2595,1115) 2595,1110 2824,1110 2921,1207 2921,1257 v2(2967,1303)
NetC41_1: C41.1 R47.2 R48.1 U4.34 | length 407.5
  Top Layer w7: U4.34@2924.02,1329.65 2924.66,1329 2977.06,1329 2994,1312.06 2994,1269.81 2999.15,1264.66 3015.34,1264.66 3066,1214 3066,1110.61 R48.1@3043.74,1088.35
  Top Layer w10: C41.1@3008.11,1073.35 3008.11,1093.58 3013.35,1088.35 R48.1@3043.74,1088.35
NetC44_1: C44.1 R49.2 R50.1 U4.40 | length 143.2
  Top Layer w7: U4.40@2924.02,1447.76 2955.76,1447.76 2969,1461 3014,1461 R50.1@3014,1508.69
NetC48_1: C48.1 C49.2 D2.3 R59.1 R64.2 | length 355.4
  Top Layer w10: R59.1@1780,1785.12 C48.1@1725,1785.12 R64.2@1725,1842.44 1780,1897.44 1782.44,1895 D2.3@1944.29,1895
NetC48_2: C48.2 C51.2 F2.2 Q2.4 R61.2 R63.2 | length 424.6
  Top Layer w20: C51.2@1560,1730 R63.2@1615,1730 1645,1730 ; C48.2@1725,1730 R61.2@1670,1730 1645,1730 ; Q2.4@1743.46,1626.3 1716.3,1626.3 1682.56,1592.56 F2.2@1638.15,1592.56 1645,1599.41 1645,1730
NetC49_1: C49.1 R60.1 | length 77.8
  Top Layer w10: C49.1@1780,1842.44 R60.1@1835,1787.44
NetC52_2: C52.2 R61.1 | length 57.3
  Top Layer w10: R61.1@1670,1785.12 C52.2@1670,1842.44
NetC58_2: C58.2 P5.5 U2.A5 U2.J5
NetC59_2: C59.2 P5.3 U2.D9
NetC60_2: C60.2 P5.1 U2.D10 U2.K6 | length 37.6
  Bottom Layer w10: v1@2722.56,4382.44 C60.2@2722.56,4420
  other v1: 2725,4380
NetC62_2: C62.2 R56.1 U4.3 | length 213.7
  Top Layer w7: U4.3@2859.06,1473.35 2859.06,1488.85 R56.1@2932.76,1562.56 ; R56.1@2935,1563.18 2955.34,1583.52 2955.34,1619.97 C62.2@2935,1640.31
NetC63_2: C63.2 R57.1 U4.4 | length 190.5
  Top Layer w7: U4.4@2839.37,1473.35 2839.37,1499.37 2885,1545 C63.2@2885,1560.31 ; C63.2@2883.43,1563.66 2900.34,1580.58 2900.34,1615.85 R57.1@2884.3,1631.89
  Top Layer w15: C63.2@2877.21,1560.31 C63.2@2880,1560.31
NetDIP1_1: DIP1.1 P9.10 R69.2 | length 610
  Top Layer w10: DIP1.1@1370,2890 1465,2795 1465,2650 P9.10@1610,2505
  Bottom Layer w10: DIP1.1@1370,2890 1382.44,2890 R69.2@1462.44,2970
NetDIP1_2: DIP1.2 P9.12 R70.2 | length 591.3
  Top Layer w10: DIP1.2@1370,2990 1485,2875 1485,2730 P9.12@1610,2605
  Bottom Layer w10: DIP1.2@1370,2990 1405,3025 R70.2@1462.44,3025
NetDIP1_3: DIP1.3 P9.14 R71.2 | length 581
  Top Layer w10: DIP1.3@1370,3090 1505,2955 1505,2810 P9.14@1610,2705
  Bottom Layer w10: DIP1.3@1370,3090 1380,3080 R71.2@1462.44,3080
NetDIP1_4: DIP1.4 P9.16 R72.2 | length 599.6
  Top Layer w10: DIP1.4@1370,3190 1610,2950 P9.16@1610,2805
  Bottom Layer w10: DIP1.4@1370,3190 1425,3135 R72.2@1462.44,3135
NetF1_77: F1.77 P10.5 | length 1021.3
  Top Layer w10: P10.5@1700,3400 1772.5,3327.5 1772.5,3167.5 2203.46,2736.54 F1.77@2352.76,2736.54
NetF1_78: F1.78 P10.3 | length 943.5
  Top Layer w10: P10.3@1700,3300 1755.5,3244.5 1755.5,3160.46 2199.11,2716.85 F1.78@2352.76,2716.85
NetF1_79: F1.79 P10.1 | length 857.7
  Top Layer w10: P10.1@1700,3191.92 2194.75,2697.17 F1.79@2352.76,2697.17
NetF1_80: F1.80 P9.15 | length 703.5
  Top Layer w10: P9.15@1700,2800 1822.52,2677.48 F1.80@2352.76,2677.48
NetF1_81: F1.81 P9.13 | length 670.2
  Top Layer w10: P9.13@1700,2700 1742.2,2657.8 F1.81@2352.76,2657.8